# Allegro board HGU_60XX_V13_PCB_20140412.brd
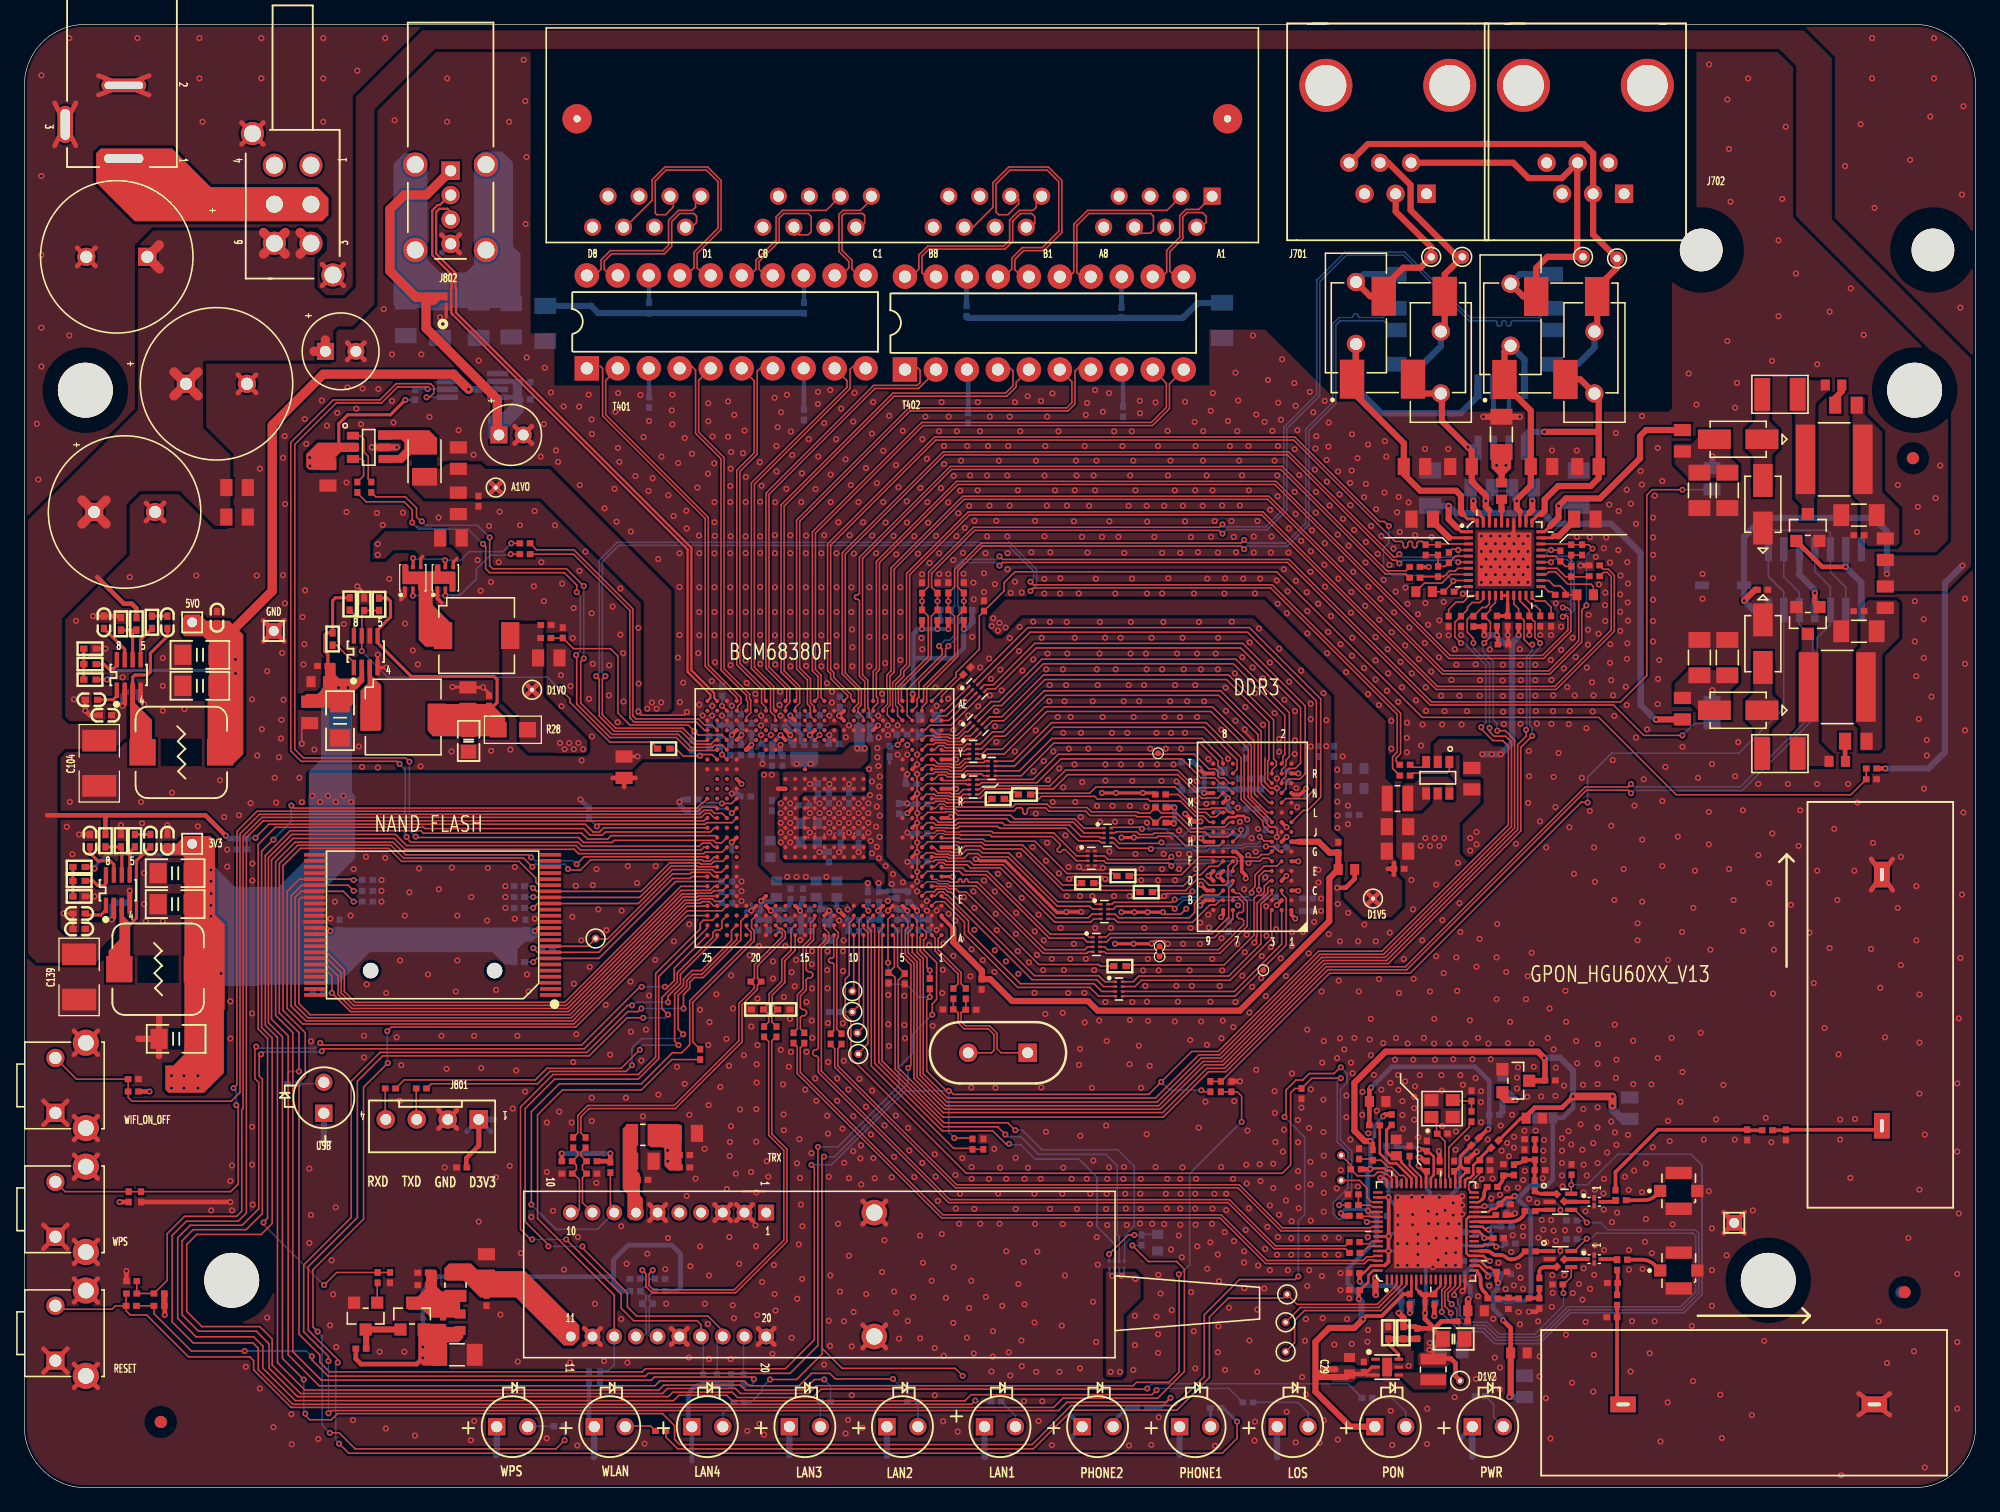
[diagram p0: board, top side]
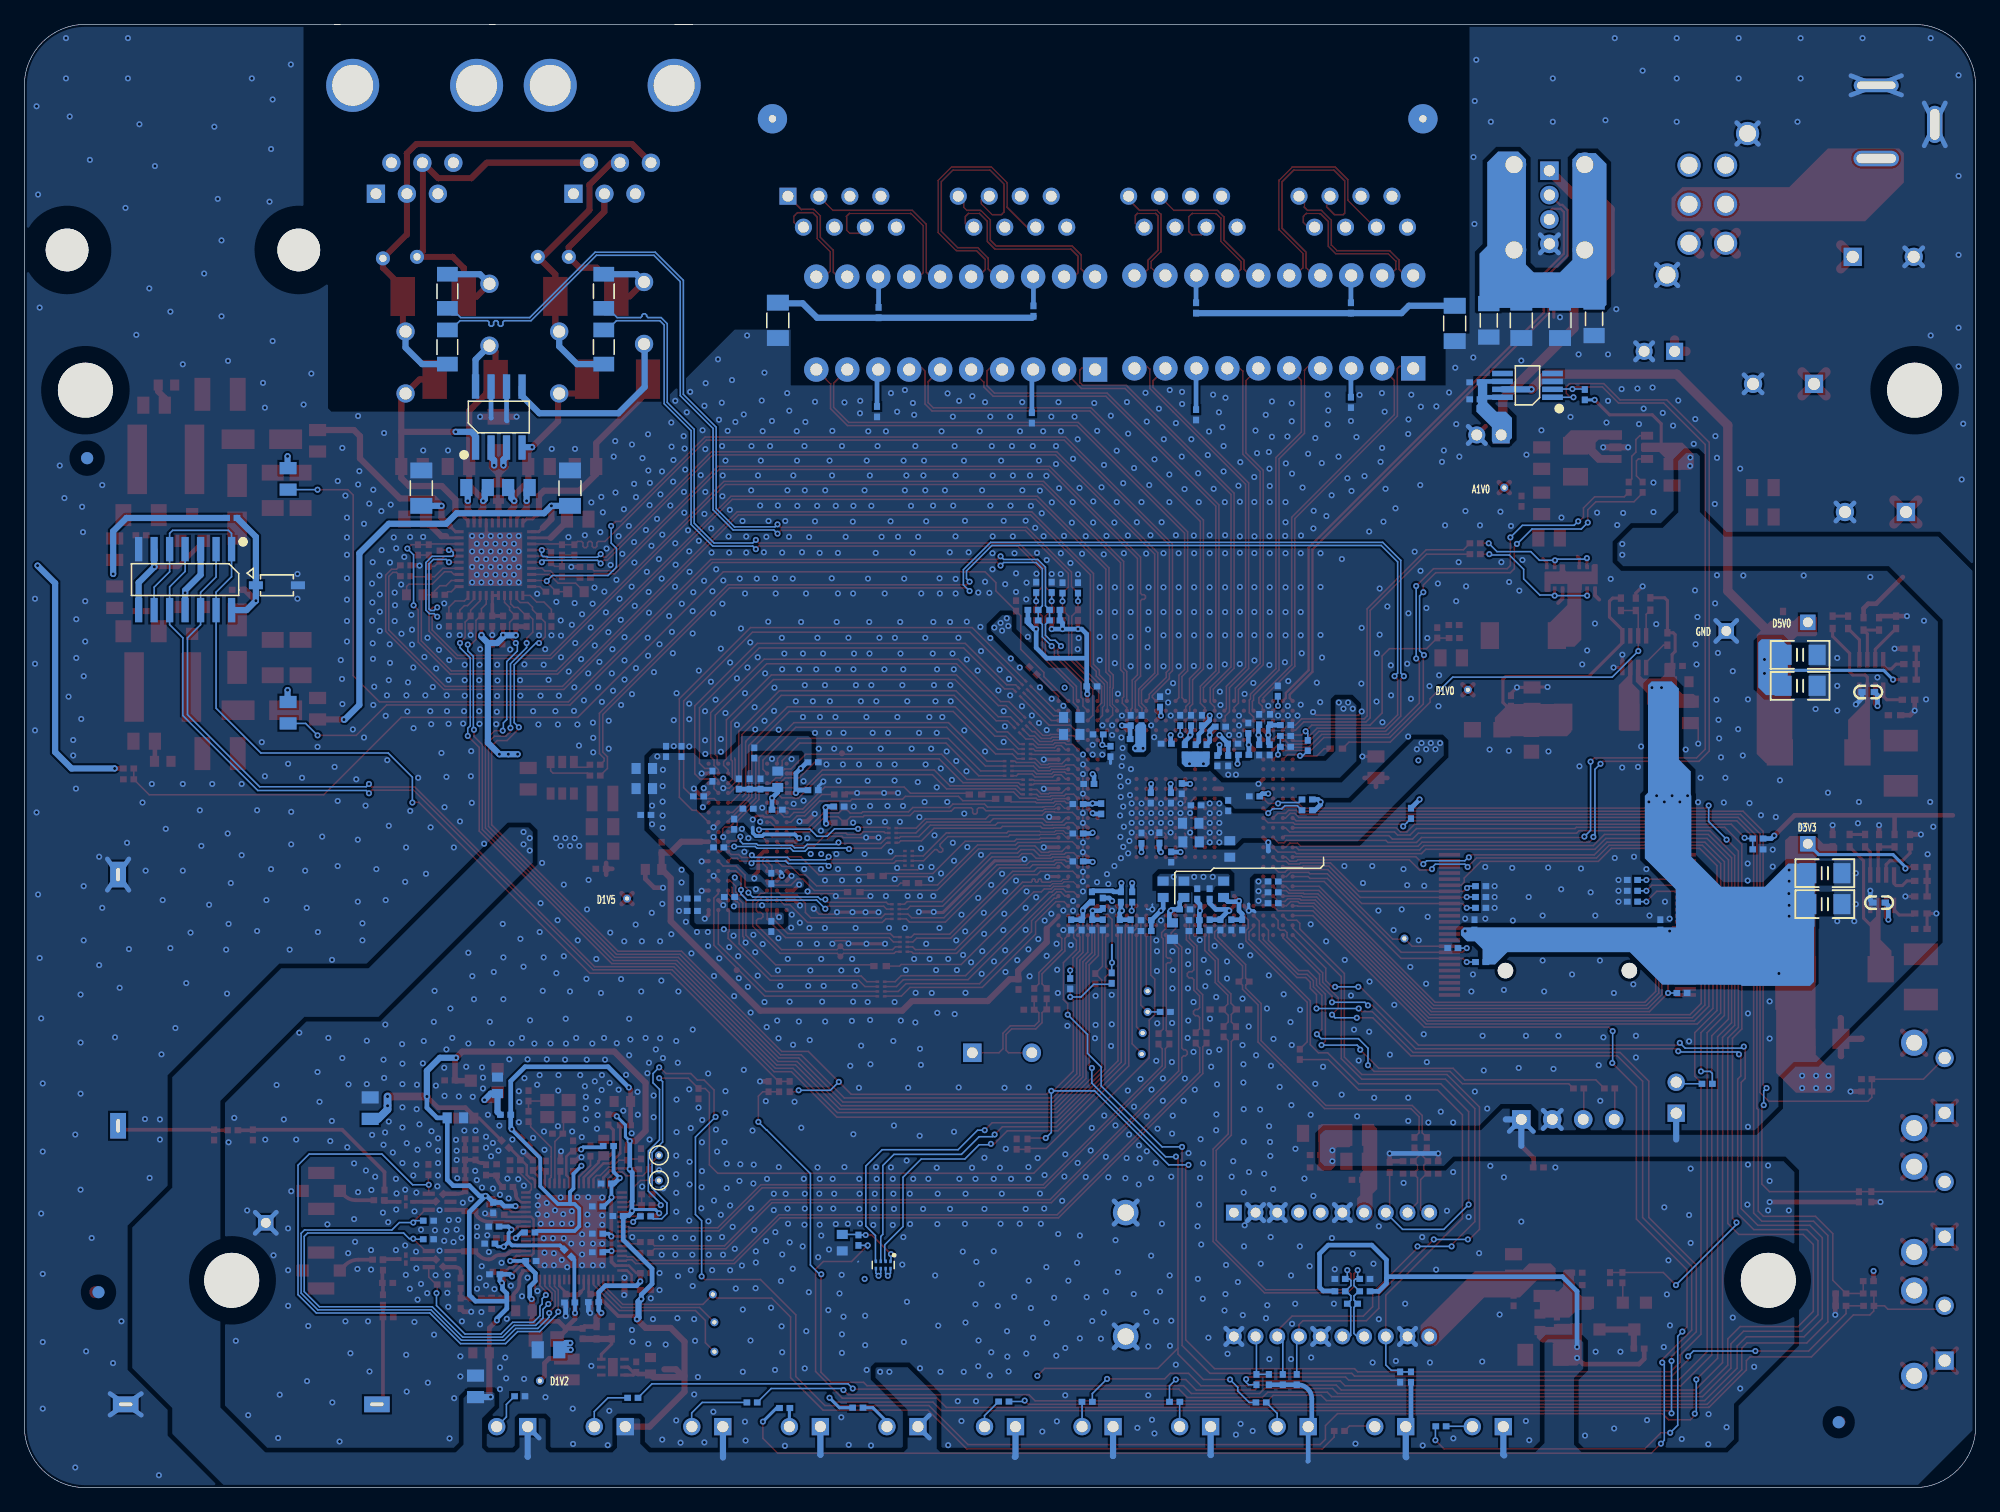
[diagram p1: board, bottom side, seen from below]

Outline 160 x 120 mm; copper layers: TOP, BOTTOM. Coordinates in mm from the lower left corner of the outline.
Outline path: 0,115 arc(0.97,117.96) 3.5,119.77 arc(4.24,119.94) 5,120 106.7,120 105.2,120 121.9,120 121.4,120 134.6,120 134.1,120 155,120 arc(158.54,118.54) 160,115 160,5 arc(158.54,1.46) 155,0 5,0 arc(1.46,1.46) 0,5 0,115

## Design rules (mm)
net group CLK48_XTAL: nets XTALN XTALP
net group DDR_CLK0: nets DDR_CLK0_N DDR_CLK0_P
net group DDR_DQS0: nets DDR_DQS0_N DDR_DQS0_P
net group DDR_DQS1: nets DDR_DQS1_N DDR_DQS1_P
net group DIFFPAIR1: nets VIN_REF_VADC_B VIP_DIAG_VADC_B
net group DIFFPAIR2: nets VIN_REF_VADC_A VIP_DIAG_VADC_A
net group DIFFPAIR4: nets RINGSENA TIPSENA
net group DIFFPAIR5: nets RINGSENB TIPSENB
net group DIFFPAIR6: nets EPHY3_TRD0_N EPHY3_TRD0_P
net group DIFFPAIR7: nets EPHY3_TRD1_N EPHY3_TRD1_P
net group DIFFPAIR8: nets EPHY2_TRD1_N EPHY2_TRD1_P
net group DIFFPAIR9: nets EPHY2_TRD0_N EPHY2_TRD0_P
net group DIFFPAIR10: nets EPHY1_TRD0_N EPHY1_TRD0_P
net group DIFFPAIR11: nets EPHY1_TRD1_N EPHY1_TRD1_P
net group DIFFPAIR12: nets EPHY0_TRD1_N EPHY0_TRD1_P
net group DIFFPAIR19: nets VRXB_N VRXB_P
net group DIFFPAIR20: nets VTXB_N VTXB_P
net group DIFFPAIR21: nets VRXA_N VRXA_P
net group DIFFPAIR22: nets VTXA_N VTXA_P
net group DIFFPAIR24: nets PCIE_RDN PCIE_RDP
net group DIFFPAIR28: nets U1_RDN0 U1_RDP0
net group DQS1: nets MEM_DQS1_N MEM_DQS1_P
net group E_TRD0: nets EPHY0_TRD0_N EPHY0_TRD0_P
net group GPON_RDN: nets GPON_RDN S_GPON_RDN
net group GPON_RDP: nets GPON_RDP S_GPON_RDP
net group GPON_TDN: nets GPON_TDN S_GPON_TDN
net group GPON_TDP: nets GPON_TDP S_GPON_TDP
net group MEM_DQS0: nets MEM_DQS0_N MEM_DQS0_P
net group PCIE_CLKOUTN: nets PCI_CKN PCIE_CLKOUTN
net group PCIE_CLKOUTP: nets PCI_CKP PCIE_CLKOUTP
net group PCIE_TDN: nets PCI_TN PCIE_TDN
net group PCIE_TDP: nets PCI_TP PCIE_TDP
net group PWR_012_MIL_PH: nets N78072419 N78072435
net group RX0: nets RXN0 RXP0
net group RX1: nets RXN1 RXP1
net group RX2: nets RXN2 RXP2
net group RX3: nets RXN3 RXP3
net group TX0: nets TXN0 TXP0
net group TX1: nets TXN1 TXP1
net group TX2: nets TXN2 TXP2
net group TX3: nets TXN3 TXP3
net group USB2: nets USB0_DM USB0_DP
net group XTAL_2: nets N77477926 N77477934
net group PWR_010_MIL_PH: nets +5V_GATE
net group TDM: nets FSPI_RXD TRX_ROUG_ONT TRX_SD

## Placement (name value [footprint] x y rotation side)
ANT1  N2430GNS  [DIP2_N2430GNS]  141.39 6.83 180 top
ANT2  N2430GNS  [DIP2_N2430GNS]  152.32 39.98 270 top
C1  10pF  [CAPC1005_IS0402Q]  120.37 24.66 0 top
C2  8pF  [CAPC1005_IS0402Q]  116.28 29.03 0 top
C4  10pF  [CAPC1005_IS0402Q]  130.92 23.57 0 top
C5  10pF  [CAPC1005_IS0402Q]  131.02 18.69 0 top
C6  10pF  [CAPC1005_IS0402Q]  120.42 15.52 0 top
C7  10pF (DNI)  [CAPC1005_IS0402Q]  126.87 20.37 180 bottom
C8  10pF (DNI)  [CAPC1005_IS0402Q]  126.87 21.89 180 bottom
C9  0.1uF  [CAPC1005_IS0402Q]  109.09 19.25 0 top
C10  0.1uF  [CAPC1005_IS0402Q]  109.06 20.14 0 top
C11  10pF  [CAPC1005_IS0402Q]  130.6 18.26 270 top
C12  10pF  [CAPC1005_IS0402Q]  130.47 23.97 90 top
C13  1uF  [CAPC1005_IS0402Q]  115.29 15.18 0 bottom
C14  0.1uF  [CAPC1005_IS0402Q]  109.06 17.6 180 top
C15  0.1uF  [CAPC1005_IS0402Q]  113 20.82 0 bottom
C16  0.1uF  [CAPC1005_IS0402Q]  113 19.3 0 bottom
C17  10pF (DNI)  [CAPC1005_IS0402Q]  126.87 26.08 90 top
C18  10pF  [CAPC1005_IS0402Q]  130.22 16.79 0 top
C19  10pF (DNI)  [CAPC1005_IS0402Q]  125.73 16.66 180 top
C20  10pF  [CAPC1005_IS0402Q]  130.18 13.97 0 top
C21  0.1uF  [CAPC1005_IS0402Q]  115.62 15.44 270 top
C22  10pF  [CAPC1005_IS0402Q]  141.27 28.93 90 top
C23  0.1uF  [CAPC1005_IS0402Q]  115.01 28.02 90 top
C24  0.1uF  [CAPC1005_IS0402Q]  117.24 26.36 90 top
C25  0.1uF  [CAPC1005_IS0402Q]  118.31 26.44 90 top
C26  1uF  [CAPC1005_IS0402Q]  116.05 26.36 90 top
C27  0.1uF  [CAPC1005_IS0402Q]  115.01 26.36 90 top
C28  100pF  [CAPC1005_IS0402Q]  114.22 12.63 90 top
C29  4.7uF  [CAPC1608_IS0603Q]  108.66 9.99 90 top
C30  0.1uF  [CAPC1005_IS0402Q]  112.29 24.94 0 bottom
C31  0.1uF  [CAPC1005_IS0402Q]  121.43 17.5 0 bottom
C32  4.7uF  [CAPC1608_IS0603Q]  119.04 14.5 180 top
C33  4.7uF  [CAPC1608_IS0603Q]  122.55 11.04 180 top
C34  0.1uF  [CAPC1005_IS0402Q]  113.33 15.21 0 bottom
C35  0.1uF  [CAPC1005_IS0402Q]  113 23.06 0 bottom
C36  4.7uF  [CAPC1608_IS0603Q]  124.66 30.32 0 bottom
C37  2.2uF  [CAPC1608_IS0603Q]  123.82 30.3 0 top
C38  10pF  [CAPC1005_IS0402Q]  144.44 28.93 90 top
C39  0.1uF  [CAPC1005_IS0402Q]  111.32 22.27 0 bottom
C40  0.1uF  [CAPC1005_IS0402Q]  121.56 22.96 270 bottom
C41  0.1uF  [CAPC1005_IS0402Q]  109.06 16.2 180 top
C42  0.1uF  [CAPC1005_IS0402Q]  113.58 15.44 270 top
C43  0.1uF  [CAPC1005_IS0402Q]  119.76 26.84 0 top
C44  22uF_6.3V  [C0805]  117.2 12.19 180 top
C45  0.1uF  [CAPC1005_IS0402Q]  109.83 9.89 90 top
C46  10pF  [CAPC1005_IS0402Q]  130.6 15.39 90 top
C47  10pF  [CAPC1005_IS0402Q]  142.92 29.31 180 top
C48  0.1uF  [CAPC1005_IS0402Q]  121.15 17.7 0 top
C49  0.1uF  [CAPC1005_IS0402Q]  24.46 67.39 180 top
C50  0.1uF  [CAPC1005_IS0402Q]  121.43 23.24 0 top
C51  10pF (DNI)  [CAPC1005_IS0402Q]  123.46 22.68 0 top
C52  10pF (DNI)  [CAPC1005_IS0402Q]  123.49 19.38 0 top
C53  4.7uF  [CAPC1608_IS0603Q]  24.18 66.09 180 top
C54  18pF  [CAPC1005_IS0402Q]  118.66 32.13 90 top
C55  100pF  [CAPC1005_IS0402Q]  38.1 64.52 270 top
C56  22uF_6.3V  [C0805]  36.42 61.24 90 top
C59  1uF  [CAPC1005_IS0402Q]  120.87 20.47 0 top
C60  0.1uF  [CAPC1005_IS0402Q]  121.51 21.41 0 bottom
C61  0.1uF  [CAPC1005_IS0402Q]  121.84 20.01 0 bottom
C62  0.1uF  [CAPC1005_IS0402Q]  118.46 18.59 180 bottom
C63  0.1uF  [CAPC1005_IS0402Q]  121.08 22.37 0 top
C64  0.01uF  [CAPC1005_IS0402Q]  113.58 27.61 90 top
C65  4.7uF  [CAPC1608_IS0603Q]  112.49 27.88 90 top
C66  4.7uF  [CAPC1608_IS0603Q]  110.97 31.67 180 top
C72  1pF (DNI)  [CAPC1005_IS0402Q]  123.87 27.3 90 top
C74  1uF  [CAPC1005_IS0402Q]  125.12 33.4 0 top
C75  2.2uF  [CAPC1608_IS0603Q]  121.2 32.99 90 bottom
C78  10uF  [CAPC2012_IS0805Q]  117.03 11.3 0 bottom
C79  10uF  [CAPC2012_IS0805Q]  36.37 64.74 90 top
C80  22uF_16V  [C1206]  12.45 36.8 0 top
C101  100uF  [CAPAETR2_250P630X1120]  24.68 93.19 90 top
C102  10uF  [CAPC2012_IS0805Q]  17.44 79.6 0 top
C103  10uF  [CAPC2012_IS0805Q]  17.44 82.01 0 top
C104  22uF_25V  [C1210]  6.14 59.41 90 top
C105  0.1uF_25V  [C0402]  8.81 65.25 180 bottom
C106  0.1uF_25V  [C0402]  4.49 47.09 0 top
C108  0.1uF_25V  [C0402]  10.33 53.06 90 top
C109  10uF  [CAPC2012_IS0805Q]  118.69 58.14 270 top
C110  22uF  [CAPC2012_IS0805Q]  112.59 54.2 0 top
C111  10uF (DNI)  [CAPC2012_IS0805Q]  112.59 52.2 0 top
C112  0.1uF  [CAPC1005_IS0402Q]  112.72 50.75 0 top
C113  220pF  [CAPC1608_IS0603Q]  148.66 59.56 180 top
C114  10uF  [CAPC3216_IS1206N]  150.43 70.23 180 top
C115  0.01uF  [CAPC1005_IS0402Q]  150.43 71.88 180 top
C116  0.1uF  [CAPC1005_IS0402Q]  142.54 73.63 0 top
C117  1uF  [CAPC3216_IS1206N]  139.64 68.07 270 top
C118  0.47uF (DNI)  [CAPC3216_IS1206N]  137.35 68.07 270 top
C119  1uF  [CAPC3216_IS1206N]  139.64 81.79 90 top
C120  0.47uF (DNI)  [CAPC3216_IS1206N]  137.35 81.79 90 top
C121  0.22uF  [CAPC3225_IS1210N]  143.96 60.2 180 top
C122  220pF  [CAPC1608_IS0603Q]  148.35 90.42 180 top
C123  0.22uF  [CAPC3225_IS1210N]  143.96 89.66 180 top
C124  0.1uF_25V  [C0402]  5.38 53.06 270 top
C125  10uF  [CAPC3216_IS1206N]  150.43 79.75 180 top
C126  0.01uF  [CAPC1005_IS0402Q]  150.43 78.1 180 top
C127  0.1uF  [CAPC1005_IS0402Q]  78.69 72.31 90 top
C129  0.1uF  [CAPC1005_IS0402Q]  37.24 80.9 270 top
C130  10uF  [CAPC2012_IS0805Q]  35.59 80.72 270 top
C131  22uF  [CAPC2012_IS0805Q]  35.59 84.43 90 top
C132  22uF_16V  [C1206]  12.36 47.85 0 bottom
C133  22uF_16V  [C1206]  12.36 50.39 0 bottom
C134  22uF_16V  [C1206]  12.36 47.85 0 top
C135  22uF_16V  [C1206]  12.36 50.39 0 top
C136  0.1uF_25V  [C0402]  11.73 53.06 270 top
C137  0.1uF_25V  [C0402]  7.92 47.98 180 bottom
C139  22uF_25V  [C1210]  4.49 41.88 90 top
C140  0.1uF_25V  [C0402]  4.49 45.82 0 top
C141  0.1uF_25V  [C0402]  5.5 64.61 0 top
C142  0.1uF_25V  [C0402]  6.52 70.96 270 top
C143  0.1uF_25V  [C0402]  6.65 63.34 0 top
C144  0.1uF_25V  [C0402]  11.73 70.96 90 top
C145  22uF_16V  [C1206]  14.39 68.3 0 top
C146  22uF_16V  [C1206]  14.39 65.76 0 top
C150  0.22uF  [CAPC1005_IS0402Q]  56.59 61.64 180 bottom
C158  22uF_16V  [C1206]  25.88 62.89 90 top
C165  3300pF  [CAPC1005_IS0402Q]  73.61 73.79 270 bottom
C166  3300pF  [CAPC1005_IS0402Q]  74.88 73.79 270 bottom
C167  3300pF  [CAPC1005_IS0402Q]  77.03 73.84 90 bottom
C171  1000uF (DNI)  [CAPAETR2_500P1250X2000]  10.08 100.94 270 top
C172  1000uF (DNI)  [CAPAETR2_500P1250X2000]  13.25 90.52 90 top
C173  1000uF  [CAPAETR2_500P1250X2000]  5.71 80.01 90 top
C176  10uF  [CAPC2012_IS0805Q]  34.98 77.88 0 top
C177  10uF  [CAPC2012_IS0805Q]  24.89 83.06 270 top
C178  0.1uF  [CAPC1005_IS0402Q]  42.77 70.74 0 top
C179  10uF  [CAPC2012_IS0805Q]  43 68.05 0 top
C180  3300pF  [CAPC1005_IS0402Q]  75.76 73.84 90 bottom
C184  3300pF  [CAPC1005_IS0402Q]  75.51 71.98 180 bottom
C189  3300pF  [CAPC1005_IS0402Q]  77.29 71.98 0 bottom
C201  0.1uF  [CAPC1005_IS0402Q]  100.15 60.25 270 bottom
C202  0.1uF  [CAPC1005_IS0402Q]  104.72 56.69 180 bottom
C203  0.1uF  [CAPC1005_IS0402Q]  95.32 57.2 180 bottom
C204  0.1uF  [CAPC1005_IS0402Q]  98.75 46.02 270 bottom
C205  0.1uF  [CAPC1005_IS0402Q]  107.39 60.37 90 bottom
C206  0.1uF  [CAPC1005_IS0402Q]  100.66 55.68 180 bottom
C207  0.1uF  [CAPC1005_IS0402Q]  95.32 59.49 180 bottom
C208  0.1uF  [CAPC1005_IS0402Q]  101.8 54.41 270 bottom
C209  0.1uF  [CAPC1005_IS0402Q]  98.75 49.96 90 bottom
C210  0.1uF  [CAPC1005_IS0402Q]  105.23 48.31 0 bottom
C211  0.1uF  [CAPC1005_IS0402Q]  109.04 55.17 0 bottom
C212  0.1uF  [CAPC1005_IS0402Q]  103.07 52.5 180 bottom
C213  0.1uF  [CAPC1005_IS0402Q]  106.12 60.37 90 bottom
C214  0.1uF  [CAPC1005_IS0402Q]  105.23 47.29 0 bottom
C215  0.1uF  [CAPC1005_IS0402Q]  103.58 58.34 270 bottom
C216  0.1uF  [CAPC1005_IS0402Q]  102.18 48.44 180 bottom
C217  4.7uF  [CAPC1608_IS0603Q]  109.17 57.33 0 bottom
C218  4.7uF  [CAPC1608_IS0603Q]  109.17 58.98 0 bottom
C219  15pF  [CAPC1005_IS0402Q]  77.62 39.19 0 top
C220  15pF  [CAPC1005_IS0402Q]  75.74 39.22 180 top
C223  0.1uF  [CAPC1005_IS0402Q]  41.09 46.15 90 bottom
C224  0.1uF  [CAPC1005_IS0402Q]  25.85 46.15 90 bottom
C229  0.1uF  [CAPC1005_IS0402Q]  98.27 55.6 180 bottom
C230  0.1uF  [CAPC1005_IS0402Q]  93.21 55.85 180 bottom
C232  2.2uF (DNI)  [CAPC1608_IS0603Q]  92.93 20.09 270 bottom
C233  1000pF  [CAPC1005_IS0402Q]  8.79 16.93 180 top
C234  4.7uF  [CAPC1608_IS0603Q]  108.41 50.7 180 top
C235  4.7uF  [CAPC1608_IS0603Q]  98.22 58.09 270 bottom
C251  0.1uF  [CAPC1005_IS0402Q]  78.49 41.27 270 top
C252  470pF  [CAPC1005_IS0402Q]  107.74 52.5 270 top
C256  470pF  [CAPC1005_IS0402Q]  99.64 57.71 270 bottom
C257  1uF  [CAPC1005_IS0402Q]  9.57 23.85 270 top
C258  1uF  [CAPC1005_IS0402Q]  8.93 33.5 0 top
C301  0.01uF  [CAPC1005_IS0402Q]  34.33 13.56 90 top
C302  100uF  [CAPC3216_IS1206N]  35.48 10.89 0 top
C303  0.01uF  [CAPC1005_IS0402Q]  32.68 16.61 180 top
C304  0.1uF  [CAPC1005_IS0402Q]  32.68 17.62 0 top
C305  10uF  [CAPC2012_IS0805Q]  37.89 18.26 270 top
C306  0.1uF  [CAPC1005_IS0402Q]  37.89 15.34 90 top
C307  10uF  [CAPC2012_IS0805Q]  54.27 29.05 180 top
C309  0.01uF  [CAPC1005_IS0402Q]  54.14 27.28 0 top
C310  0.1uF  [CAPC1005_IS0402Q]  54.14 26.26 180 top
C311  10uF  [CAPC2012_IS0805Q]  50.72 26.77 180 top
C312  0.1uF  [CAPC1005_IS0402Q]  50.72 25.24 180 top
C313  0.1uF  [CAPC1005_IS0402Q]  61.67 37.39 270 top
C314  0.1uF  [CAPC1005_IS0402Q]  60.65 37.39 270 top
C315  0.1uF  [CAPC1005_IS0402Q]  46.02 28.29 270 top
C316  0.1uF  [CAPC1005_IS0402Q]  45 28.29 270 top
C405  0.1uF  [CAPC1005_IS0402Q]  51.22 89 90 bottom
C406  0.1uF  [CAPC1005_IS0402Q]  63.92 87.98 90 bottom
C407  0.1uF  [CAPC1005_IS0402Q]  77.39 87.73 90 bottom
C408  0.1uF  [CAPC1005_IS0402Q]  90.09 88.24 90 bottom
C409  22uF_16V  [C1206]  14.39 68.3 0 bottom
C414  22uF_16V  [C1206]  14.39 65.76 0 bottom
C415  0.1uF_25V  [C0402]  15.79 71.34 270 top
C417  1000pf (DNI)  [CAPC3216_IS1206N]  42.71 95.47 90 bottom
C422  1000pf (DNI)  [CAPC3216_IS1206N]  98.21 95.73 90 bottom
C504  10uF  [CAPC2012_IS0805Q]  123.01 8.3 90 bottom
C505  10uF  [CAPC2012_IS0805Q]  131.64 31.12 90 bottom
C506  10uF  [CAPC2012_IS0805Q]  49.17 59.08 90 top
C507  10uF  [CAPC2012_IS0805Q]  23.39 63.58 270 top
C602  10pF  [CAPC1005_IS0402Q]  124.23 16.76 90 top
C603  10pF  [CAPC1005_IS0402Q]  123.85 24.76 270 top
C701  0.1uF  [CAPC1005_IS0402Q]  121.25 69.16 180 top
C704  0.47uF  [CAPC1608_IS0603Q]  114.78 73.47 180 top
C705  3300pF  [CAPC2012_IS0805Q]  117.8 83.74 0 top
C706  3300pF  [CAPC2012_IS0805Q]  113.99 83.74 180 top
C708  0.1uF  [CAPC1005_IS0402Q]  114.01 75.51 180 top
C710  0.1uF  [CAPC1005_IS0402Q]  114.01 74.62 180 top
C711  220pF  [CAPC1005_IS0402Q]  115.92 76.9 90 top
C712  0.1uF  [CAPC3216_IS1206N]  115.26 81.96 270 bottom
C713  220pF  [CAPC1005_IS0402Q]  126.84 76.9 90 top
C714  1uF  [CAPC1005_IS0402Q]  121.63 71.06 90 top
C720  0.1uF  [CAPC2012_IS0805Q]  114.63 79.42 0 top
C721  0.1uF  [CAPC1005_IS0402Q]  116.79 71.04 90 top
C726  0.1uF  [CAPC3216_IS1206N]  121.12 86.37 270 top
C727  0.1uF  [CAPC2012_IS0805Q]  127.96 79.42 180 top
C728  0.1uF  [CAPC1005_IS0402Q]  124.3 71.06 90 top
C732  1uF  [CAPC1005_IS0402Q]  72.46 65.71 180 bottom
C733  1uF  [CAPC1005_IS0402Q]  66.87 64.44 90 bottom
C741  0.1uF  [CAPC1005_IS0402Q]  128.75 74.74 0 top
C743  0.1uF  [CAPC3216_IS1206N]  127.45 81.96 270 bottom
C744  0.1uF  [CAPC1005_IS0402Q]  128.75 75.63 0 top
C746  0.47uF  [CAPC1608_IS0603Q]  127.98 73.22 0 top
C747  3300pF  [CAPC2012_IS0805Q]  124.41 83.74 180 top
C748  3300pF  [CAPC2012_IS0805Q]  128.22 83.74 0 top
C800  0.1uF  [CAPC1005_IS0402Q]  41.06 90.65 0 bottom
C801  0.1uF  [CAPC1005_IS0402Q]  35.86 26.26 180 top
C802  100pF  [CAPC1005_IS0402Q]  67 36.8 90 top
C803  100pF  [CAPC1005_IS0402Q]  66.11 36.8 90 top
C804  0.1uF  [CAPC1005_IS0402Q]  63.95 36.88 90 top
C805  0.1uF  [CAPC1005_IS0402Q]  63.06 36.88 90 top
C806  100uF  [CAPAETR2_200P500X1100]  38.9 86.33 90 top
C807  0.1uF  [CAPC1005_IS0402Q]  41.06 89.25 0 bottom
C812  1000pf  [CAPC3216_IS1206N]  37.25 95.73 270 bottom
C813  1000pf  [CAPC3216_IS1206N]  34.08 95.73 270 bottom
C901  4.7uF  [CAPC1608_IS0603Q]  74.11 63.17 0 bottom
C902  4.7uF  [CAPC1608_IS0603Q]  74.11 61.77 0 bottom
C903  0.1uF  [CAPC1005_IS0402Q]  72.72 57.71 0 bottom
C904  0.1uF  [CAPC1005_IS0402Q]  73.61 56.06 0 bottom
C905  0.1uF  [CAPC1005_IS0402Q]  73.61 53.64 0 bottom
C906  0.1uF  [CAPC1005_IS0402Q]  73.61 51.36 0 bottom
C907  0.1uF  [CAPC1005_IS0402Q]  59.13 56.69 0 bottom
C908  1uF  [CAPC1005_IS0402Q]  69.29 62.91 90 bottom
C909  0.1uF  [CAPC1005_IS0402Q]  68.4 62.91 90 bottom
C910  1uF  [CAPC1005_IS0402Q]  61.92 62.41 180 bottom
C911  0.1uF  [CAPC1005_IS0402Q]  57.6 48.82 180 bottom
C912  0.1uF  [CAPC1005_IS0402Q]  57.6 47.93 180 bottom
C913  0.1uF  [CAPC1005_IS0402Q]  57.6 49.71 180 bottom
C920  1uF  [CAPC1005_IS0402Q]  66.37 61.01 0 bottom
C922  1uF  [CAPC1005_IS0402Q]  64.33 62.91 90 bottom
C923  22uF  [CAPC1608_IS0603Q]  61.16 52.37 270 bottom
C924  22uF  [CAPC1608_IS0603Q]  64.36 54.48 0 bottom
C925  22uF (DNI)  [CAPC1608_IS0603Q]  64.33 52.96 0 bottom
C931  0.1uF  [CAPC1005_IS0402Q]  65.99 56.56 270 bottom
C932  0.1uF  [CAPC1005_IS0402Q]  66.93 53.29 90 bottom
C933  0.1uF  [CAPC1005_IS0402Q]  65.96 51.71 270 bottom
C934  0.1uF  [CAPC1005_IS0402Q]  68.4 53.26 90 bottom
C935  0.1uF  [CAPC1005_IS0402Q]  61.29 55.93 90 bottom
C936  0.1uF  [CAPC1005_IS0402Q]  63.93 55.95 0 bottom
C937  0.1uF  [CAPC1005_IS0402Q]  65.1 57.33 270 bottom
C938  0.1uF  [CAPC1005_IS0402Q]  67.64 56.56 270 bottom
C941  1uF  [CAPC1005_IS0402Q]  63.45 62.91 90 bottom
C943  1uF  [CAPC1005_IS0402Q]  60.91 61.01 180 bottom
C944  1000pF  [CAPC1005_IS0402Q]  68.02 46.53 0 bottom
C945  1uF  [CAPC1005_IS0402Q]  68.02 45.64 0 bottom
C946  1000pF  [CAPC1005_IS0402Q]  64.84 47.42 180 bottom
C947  10uF  [CAPC1608_IS0603Q]  65.86 45.64 270 bottom
C948  1uF (DNI)  [CAPC1005_IS0402Q]  59.64 62.28 90 bottom
C949  1uF (DNI)  [CAPC1005_IS0402Q]  58.75 62.99 90 bottom
C950  1000pF  [CAPC1005_IS0402Q]  56.59 62.53 180 bottom
C951  1uF  [CAPC1005_IS0402Q]  57.86 62.99 90 bottom
C952  1000pF  [CAPC1005_IS0402Q]  62.81 46.15 270 bottom
C953  1uF  [CAPC1005_IS0402Q]  61.92 46.15 270 bottom
C954  1000pF  [CAPC1005_IS0402Q]  64.08 45.64 0 bottom
C955  1uF  [CAPC1005_IS0402Q]  64.08 46.53 0 bottom
C956  1000pF  [CAPC1005_IS0402Q]  61.03 46.15 270 bottom
C957  1uF  [CAPC1005_IS0402Q]  60.14 46.15 270 bottom
C958  1uF  [CAPC1005_IS0402Q]  72.44 46.15 270 bottom
C959  1000pF  [CAPC1005_IS0402Q]  71.57 46.15 270 bottom
C960  1uF  [CAPC1005_IS0402Q]  70.18 46.15 270 bottom
C961  1000pF  [CAPC1005_IS0402Q]  69.29 46.15 270 bottom
C962  1000pF  [CAPC1005_IS0402Q]  74.16 46.15 270 bottom
C963  1uF  [CAPC1005_IS0402Q]  73.3 46.15 270 bottom
D101  ES1D  [DIOM4326_SMA_DO214ACN]  140.53 63.75 180 top
D102  ES1D  [DIOM4326_SMA_DO214ACN]  140.53 85.98 180 top
D103  ES1D  [DIOM4326_SMA_DO214ACN]  142.56 69.21 270 top
D104  ES1D  [DIOM4326_SMA_DO214ACN]  142.56 80.64 90 top
D121  MMSZ4687T1G  [DIOS2_ON_SOD123N]  139.29 74 180 bottom
D201  1LED  [LED_2_2_54]  120 5 0 top
D202  1LED  [LED_2_2_54]  112 5 0 top
D203  1LED  [LED_2_2_54]  104 5 0 top
D205  1LED  [LED_2_2_54]  40 5 0 top
D206  1LED  [LED_2_2_54]  96 5 0 top
D207  1LED  [LED_2_2_54]  88 5 0 top
D208  1LED  [LED_2_2_54]  80 5 0 top
D209  1LED  [LED_2_2_54]  72 5 0 top
D210  1LED  [LED_2_2_54]  64 5 0 top
D211  1LED  [LED_2_2_54]  56 5 0 top
D212  1LED  [LED_2_2_54]  48 5 0 top
D213  1LED  [LED_2_2_54]  24.55 31.97 90 top
D800  RClamp0582N  [SLP1210N6]  34.97 97.25 0 top
FB1  10 Ohms  [INDC1005_IS0402Q]  117.93 13.64 180 top
FB2  600@100MHz  [INDC1005_IS0402Q]  118.94 28.37 225 top
FB3  600 Ohms  [INDC1005_IS0402Q]  115.44 19.22 225 bottom
FB102  60@100MHz  [INDC2012_IS0805Q]  152.59 73.02 270 top
FB103  60@100MHz  [INDC2012_IS0805Q]  152.59 76.96 90 top
FB702  600 Ohms  [INDC1005_IS0402Q]  120.74 71.06 90 top
FB901  220@100MHz  [INDC1005_IS0402Q]  68.91 61.39 0 bottom
FB902  600 Ohms  [INDC1005_IS0402Q]  63.06 60.5 270 bottom
FB903  600 Ohms  [INDC1005_IS0402Q]  62.18 59.61 270 bottom
FB904  600 Ohms  [INDC1005_IS0402Q]  64.84 60.5 270 bottom
FB905  600 Ohms  [INDC1005_IS0402Q]  63.95 60.5 270 bottom
FB906  600 Ohms  [INDC1005_IS0402Q]  61.29 59.61 270 bottom
FB907  220@100MHz  [INDC1608_IS0603Q]  66.62 49.07 90 bottom
FB908  220@100MHz  [INDC1608_IS0603Q]  64.92 49.07 270 bottom
FB909  600 Ohms  [INDC1005_IS0402Q]  57.88 60.5 270 bottom
FB910  600 Ohms  [INDC1005_IS0402Q]  62.81 48.69 90 bottom
FB911  600 Ohms  [INDC1005_IS0402Q]  63.83 48.69 90 bottom
FB912  220@100MHz  [INDC1608_IS0603Q]  61.67 49.07 90 bottom
FB913  600 Ohms  [INDC1005_IS0402Q]  71.57 47.93 270 bottom
FB914  600 Ohms  [INDC1005_IS0402Q]  70.09 48.44 90 bottom
FB915  600 Ohms  [INDC1005_IS0402Q]  72.46 48.44 90 bottom
FL1  LFL152G45TC1A219  [FILS4_MUR_LFL152G45TC1Q]  128.72 18.74 0 top
FL2  LFL152G45TC1A219  [FILS4_MUR_LFL152G45TC1Q]  128.72 23.44 0 top
GND  TEST HOLE  [TH50SQ32D]  140.21 21.72 0 top
J2  A-1JB  [AMPHL_A-1JB]  135.66 17.8 270 top
J3  A-1JB  [AMPHL_A-1JB]  135.65 24.33 270 top
J101  AJ_DR_DS210  [DS_210]  8 112 270 top
J401  RJ45-1X4-8P-RA  [NETSWAP_NSK-U-04-8-8-X-X]  97.39 105.91 180 top
J701  5523-1-6P4C  [AMPHL_RJE01-640-021]  114.98 106.11 180 top
J702  5523-1-6P4C  [AMPHL_RJE01-640-021]  131.17 106.11 180 top
J801  TJC3-4  [HDR1X4]  37.25 30.2 180 top
J802  USB-UPRIGHT  [MOL_67329-8020]  34.95 108 270 top
L1  1.8nH (DNI)  [INDC1005_IS0402Q]  123.44 28.57 180 top
L2  2.7nH (DNI)  [INDC1005_IS0402Q]  124.28 26.03 0 top
L3  4.7nH  [INDS2_MUR_LQG15HQ]  121.69 15.11 0 top
L4  2.2uH  [INDS2_CYN_PS125201BQ]  115.52 9.69 90 top
L5  2.0nH (DNI)  [INDC1005_IS0402Q]  124.23 15.11 270 top
L6  4.7nH  [INDS2_MUR_LQG15HQ]  121.28 26.06 180 top
L7  2.0nH (DNI)  [INDC1005_IS0402Q]  123.01 27.3 90 top
L8  1.5uH  [INDS2_TDK_SLF6045Q]  31.06 63.2 0 top
L102  5.6UH_3A  [PCS73]  10.96 42.52 90 top
L103  5.6UH_3A  [PCS73]  12.87 60.3 90 top
L105  3.3uH  [INDS2_TDK_FLF3215TQ_MOD]  32.81 84.17 270 top
L106  1.5uH  [INDS2_TDK_SLF6045Q]  37.08 69.88 0 top
L110  1.5uH  [INDS2_CYN_PS125201BQ]  112.59 56.51 180 top
L111  0  [RESC2012_IS0805Q]  135.96 63.88 270 top
L112  0  [RESC2012_IS0805Q]  135.96 85.85 90 top
L113  10uH  [INDS2_TAYUD_NR6045Q]  148.66 65.66 270 top
L114  10uH  [INDS2_TAYUD_NR6045Q]  148.4 84.33 270 top
L301  1.2uH  [INDS2_CC_0805CSQ]  35.35 16.61 180 top
L302  1.2uH  [INDS2_CC_0805CSQ]  50.72 28.93 270 top
L901  22nH  [INDC1005_IS0402Q]  71.7 55.68 270 bottom
NOREF  -  [unnamed]  11.18 5.38 0 top
NOREF#2  -  [unnamed]  156.5 101.5 0 top
NOREF#3  -  [unnamed]  17 17 0 top
NOREF#4  -  [#2]  392.5 -124.03 0 top
NOREF#5  -  [unnamed]  155 90 0 top
NOREF#6  -  [unnamed]  154.86 84.43 0 top
NOREF#7  -  [unnamed]  143 17 0 top
NOREF#8  -  [unnamed]  137.5 101.5 0 top
NOREF#9  -  [unnamed]  5 90 0 top
NOREF#10  -  [unnamed]  154.18 16.03 0 top
NOREF#11  -  [#2]  392.5 -124.03 180 bottom
NOREF#12  -  [unnamed]  11.23 5.36 180 bottom
NOREF#13  -  [unnamed]  154.86 84.43 90 bottom
NOREF#14  -  [unnamed]  153.92 16.03 180 bottom
Q103  62-1057PBF  [SOT23_G_S_D]  146.24 71.12 180 top
Q104  62-1057PBF  [SOT23_G_S_D]  146.24 78.74 0 top
Q105  AO6604  [SOT23-6_1_2_3_4_5_6]  115.9 58.22 270 top
Q106  AO6604  [SOT23-6_1_2_3_4_5_6]  28.24 85.31 0 top
Q107  SIA517DJ-T1-GE3  [SON65P200X200_6_DUAL_SC70-6L]  34.52 74.61 90 top
Q108  SIA517DJ-T1-GE3  [SON65P200X200_6_DUAL_SC70-6L]  31.85 74.61 90 top
Q301  SI2323DS-T1-E3  [SOT23_G_S_D]  31.79 14.07 0 top
Q303  MMBT3904LT1G  [SOT23_B_E_C]  27.98 14.07 180 top
R1  422  [RESC1005_IS0402Q]  118.66 30.44 270 top
R2  4.7K  [RESC1005_IS0402Q]  109.19 26.11 180 top
R3  4.7K (DNI)  [RESC1005_IS0402Q]  109.44 27.38 90 top
R4  4.7K (DNI)  [RESC1005_IS0402Q]  110.56 27.28 90 top
R5  15K  [RESC1005_IS0402Q]  119.76 26.03 0 top
R7  10R_5C  [R0402]  10.46 70.96 90 top
R9  3K  [RESC1005_IS0402Q]  109.06 22.25 0 bottom
R10  0  [RESC1005_IS0402Q]  118.56 20.93 180 bottom
R11  5.6pF  [CAPC1005_IS0402Q]  122.96 15.52 0 top
R12  4.7K (DNI)  [RESC1005_IS0402Q]  108.96 24.05 0 top
R13  5.6pF  [CAPC1005_IS0402Q]  122.14 26.06 90 top
R14  0  [RESC1005_IS0402Q]  112.11 28.01 180 bottom
R15  0  [RESC1005_IS0402Q]  125.95 18.41 45 top
R16  0  [RESC1005_IS0402Q]  125.95 23.77 315 top
R17  0  [RESC1005_IS0402Q]  112.11 30.17 270 top
R20  0  [RESC1005_IS0402Q]  120.57 28.17 225 top
R21  100KR  [R0402]  25.27 69.6 270 top
R22  499KR  [R0402]  26.67 72.47 270 top
R23  0 (DNI)  [RESC1005_IS0402Q]  110.71 29.71 0 top
R24  200KR  [R0402]  29.08 72.44 90 top
R25  300KR  [R0402]  27.86 72.44 270 top
R26  0  [RESC1005_IS0402Q]  120.54 30.58 180 bottom
R27  105KR  [R0402]  113.08 12.7 90 top
R28  0R_NC  [R0805]  40.06 62.15 0 top
R29  NC  [R0402]  52.43 60.6 0 top
R32  100KR  [R0402]  111.84 12.7 270 top
R101  43.2K  [RESC1005_IS0402Q]  17.85 53.23 0 bottom
R102  13K  [RESC1005_IS0402Q]  17.85 52.34 0 bottom
R105  1.5K  [RESC1005_IS0402Q]  142.99 79.52 0 bottom
R106  150  [RESC2012_IS0805Q]  150.18 61.21 0 top
R110  22K  [RESC1005_IS0402Q]  72.19 41.73 270 top
R111  4.99K  [RESC1005_IS0402Q]  71.95 61.77 0 bottom
R112  10K  [RESC1005_IS0402Q]  70.94 60.37 270 bottom
R113  4.99K  [RESC1005_IS0402Q]  42.75 69.67 180 top
R114  20K  [RESC1005_IS0402Q]  44.15 70.1 90 top
R116  150  [RESC2012_IS0805Q]  149.37 88.77 0 top
R117  22K  [RESC1005_IS0402Q]  70.87 41.81 270 top
R119  649K  [RESC2012_IS0805Q]  138.38 63.55 270 bottom
R120  649K  [RESC2012_IS0805Q]  138.38 82.73 270 bottom
R122  0  [RESC1005_IS0402Q]  113.2 59.28 180 top
R123  0  [RESC1005_IS0402Q]  113.2 58.39 180 top
R124  10.7K  [RESC1005_IS0402Q]  151.46 58.98 180 top
R125  1.78K  [RESC1005_IS0402Q]  151.46 58.09 180 top
R126  10R_5C  [R0402]  9.06 53.06 90 top
R127  100K_5C  [R0402]  6.65 53.06 270 top
R128  33K  [R0402]  4.49 49.75 180 top
R129  40K2_1C  [R0402]  4.49 50.9 180 top
R130  12K7_1C  [R0402]  4.49 48.48 0 top
R131  100K_5C  [R0402]  9.19 70.84 270 top
R133  40K2_1C  [R0402]  5.38 66.26 180 top
R134  7K68_1C  [R0402]  5.38 68.8 0 top
R135  100K_5C  [R0402]  7.92 70.84 90 top
R136  33K  [R0402]  5.38 67.53 180 top
R142  13.7K  [RESC1005_IS0402Q]  75.51 71.12 0 bottom
R143  13.7K  [RESC1005_IS0402Q]  77.29 71.12 180 bottom
R144  21.5K  [RESC1005_IS0402Q]  54.76 60.86 270 bottom
R148  158K  [RESC1005_IS0402Q]  74.88 71.55 90 top
R149  158K  [RESC1005_IS0402Q]  73.61 71.55 90 top
R150  158K  [RESC1005_IS0402Q]  75.76 71.55 90 top
R151  158K  [RESC1005_IS0402Q]  77.03 71.55 90 top
R152  158K  [RESC1005_IS0402Q]  74.88 73.79 90 top
R153  158K  [RESC1005_IS0402Q]  73.61 73.79 90 top
R154  158K  [RESC1005_IS0402Q]  77.03 73.79 90 top
R155  158K  [RESC1005_IS0402Q]  75.76 73.79 90 top
R170  40.2K  [RESC1005_IS0402Q]  56.59 60.76 180 bottom
R176  2.61K (DNI)  [RESC1005_IS0402Q]  44.49 26.77 0 top
R177  2.61K (DNI)  [RESC1005_IS0402Q]  46.52 26.77 180 top
R178  4.32K (DNI)  [RESC1005_IS0402Q]  44.49 25.75 180 top
R179  4.32K (DNI)  [RESC1005_IS0402Q]  46.52 25.75 0 top
R181  150R_5C_NC  [R0402]  62.27 39.21 0 top
R182  150R_5C_NC  [R0402]  60.11 39.21 180 top
R183  100 (DNI)  [RESC1005_IS0402Q]  59.99 41.5 0 top
R188  0  [RESC1005_IS0402Q]  41.04 77.44 0 top
R190  0  [RESC1005_IS0402Q]  41.04 76.55 0 top
R195  0  [RESC1005_IS0402Q]  28.45 82.04 270 top
R197  0  [RESC1005_IS0402Q]  27.3 82.04 270 top
R201  10  [RESC1005_IS0402Q]  77.19 40.51 90 top
R202  10  [RESC1005_IS0402Q]  76.17 40.51 90 top
R204  240  [RESC1005_IS0402Q]  77.29 66.98 225 top
R205  1K  [RESC1005_IS0402Q]  101.42 57.71 270 bottom
R206  1K  [RESC1005_IS0402Q]  100.53 57.71 90 bottom
R207  33R_5C  [R0402]  82.01 56.84 180 top
R208  33R_5C  [R0402]  79.85 56.49 180 top
R211  0  [RESC1005_IS0402Q]  8.76 14.91 180 top
R212  0 (DNI)  [RESC1005_IS0402Q]  8.79 15.92 0 top
R215  240  [RESC1005_IS0402Q]  93.16 56.84 0 top
R216  0  [RESC1005_IS0402Q]  74.24 41.32 90 top
R217  4.7K  [RESC1005_IS0402Q]  11.05 15.92 180 top
R218  1K  [RESC1005_IS0402Q]  40.59 43.1 0 bottom
R219  0_NC  [RESC1005_IS0402Q]  70.84 41.78 90 bottom
R220  3K  [RESC1005_IS0402Q]  74.24 41.33 90 bottom
R221  56.2  [RESC1005_IS0402Q]  93.16 54.53 0 top
R222  56.2  [RESC1005_IS0402Q]  93.16 55.78 0 top
R223  3K  [RESC1005_IS0402Q]  78.63 28.17 270 top
R224  1K (DNI)  [RESC1005_IS0402Q]  77.75 28.17 270 top
R225  10K  [RESC1005_IS0402Q]  11.05 14.91 180 top
R228  10K  [RESC1005_IS0402Q]  69.16 48.44 90 bottom
R235  150  [RESC1005_IS0402Q]  119.38 7.49 0 bottom
R236  150  [RESC1005_IS0402Q]  110.11 7.37 0 bottom
R237  150  [RESC1005_IS0402Q]  100.33 6.99 0 bottom
R239  150  [RESC1005_IS0402Q]  43.84 5.03 180 bottom
R240  150  [RESC1005_IS0402Q]  97.66 6.53 180 bottom
R241  150  [RESC1005_IS0402Q]  91.66 6.55 180 bottom
R242  150  [RESC1005_IS0402Q]  79.69 7.06 0 bottom
R245  150  [RESC1005_IS0402Q]  72.85 7.04 0 bottom
R246  150  [RESC1005_IS0402Q]  65.68 7.04 180 bottom
R248  150  [RESC1005_IS0402Q]  58.59 6.99 180 bottom
R249  150  [RESC1005_IS0402Q]  52.17 4.65 180 top
R250  150  [RESC1005_IS0402Q]  22.01 33.12 0 bottom
R251  10K  [RESC1005_IS0402Q]  8.55 23.85 90 top
R252  10K  [RESC1005_IS0402Q]  8.93 32.48 180 top
R253  4.7K (DNI)  [RESC1005_IS0402Q]  66.45 39.01 180 bottom
R254  4.7K (DNI)  [RESC1005_IS0402Q]  40.59 47.55 180 bottom
R255  4.7K (DNI)  [RESC1005_IS0402Q]  40.59 48.44 180 bottom
R256  4.7K (DNI)  [RESC1005_IS0402Q]  24.08 40.56 180 bottom
R257  4.7K (DNI)  [RESC1005_IS0402Q]  42.87 44.25 0 bottom
R258  4.7K  [RESC1005_IS0402Q]  40.59 49.33 180 bottom
R259  4.7K  [RESC1005_IS0402Q]  28.14 49.83 0 bottom
R260  4.7K  [RESC1005_IS0402Q]  28.14 48.94 0 bottom
R261  4.7K (DNI)  [RESC1005_IS0402Q]  28.14 48.06 0 bottom
R262  4.7K (DNI)  [RESC1005_IS0402Q]  54.81 56.44 180 bottom
R263  4.7K  [RESC1005_IS0402Q]  54.81 55.55 180 bottom
R264  4.7K (DNI)  [RESC1005_IS0402Q]  46.3 55.29 90 bottom
R265  33R_5C  [R0402]  90.09 50.16 180 top
R266  0  [RESC1005_IS0402Q]  91.61 20.29 270 bottom
R267  33R_5C  [R0402]  87.19 49.58 180 top
R268  33R_5C  [R0402]  89.83 42.77 180 top
R269  33R_5C  [R0402]  91.99 48.84 180 top
R301  1K  [RESC1005_IS0402Q]  27.6 11.4 0 top
R302  10K  [RESC1005_IS0402Q]  28.96 17.22 270 top
R303  1K  [RESC1005_IS0402Q]  29.98 17.22 270 top
R305  4.7K  [RESC1005_IS0402Q]  55.67 8.86 90 bottom
R306  1K  [RESC1005_IS0402Q]  56.81 8.86 90 bottom
R309  402  [RESC1005_IS0402Q]  47.19 9.07 270 bottom
R319  10K  [RESC1005_IS0402Q]  48.05 26.26 270 top
R323  33  [RESC1005_IS0402Q]  55.41 35.53 270 top
R324  0 (DNI)  [RESC1608_IS0603Q]  35.73 13.56 90 top
R325  1K (DNI)  [RESC1005_IS0402Q]  46.3 9.07 90 bottom
R326  10K  [RESC1005_IS0402Q]  57.95 8.86 90 bottom
R327  0  [RESC1005_IS0402Q]  58.97 8.86 90 bottom
R328  2.61K (DNI)  [RESC1005_IS0402Q]  50.08 16.1 0 bottom
R329  2.61K (DNI)  [RESC1005_IS0402Q]  52.11 16.1 180 bottom
R330  100 (DNI)  [RESC1005_IS0402Q]  51.1 15.08 0 bottom
R331  4.32K (DNI)  [RESC1005_IS0402Q]  50.08 17.12 180 bottom
R332  4.32K (DNI)  [RESC1005_IS0402Q]  52.11 17.12 0 bottom
R402  75 (DNI)  [RESC1005_IS0402Q]  51.22 96.74 270 bottom
R404  75 (DNI)  [RESC1005_IS0402Q]  63.92 96.74 270 bottom
R405  75 (DNI)  [RESC1005_IS0402Q]  77.26 96.49 270 bottom
R407  75 (DNI)  [RESC1005_IS0402Q]  89.96 96.36 270 bottom
R409  6.04K  [RESC1005_IS0402Q]  65.22 62.91 90 bottom
R502  10K  [RESC1005_IS0402Q]  109.06 22.3 0 top
R503  0  [RESC1005_IS0402Q]  108.96 23.16 0 top
R704  6.49K  [RESC1005_IS0402Q]  116.81 73.47 0 top
R709  54.9K  [RESC1005_IS0402Q]  115.92 75.13 90 top
R710  44.2K  [RESC1005_IS0402Q]  116.81 76.27 270 top
R712  84.5K  [RESC1005_IS0402Q]  114.9 76.9 90 top
R716  84.5K  [RESC1005_IS0402Q]  127.73 76.9 90 top
R719  44.2K  [RESC1005_IS0402Q]  125.95 76.4 270 top
R720  54.9K  [RESC1005_IS0402Q]  126.84 75.13 90 top
R723  10M  [RESC3216_IS1206N]  112.49 98.11 270 bottom
R725  6.49K  [RESC1005_IS0402Q]  125.95 73.22 180 top
R732  10M  [RESC3216_IS1206N]  112.49 93.54 270 bottom
R734  10M  [RESC3216_IS1206N]  125.32 98.11 270 bottom
R736  10M  [RESC3216_IS1206N]  125.32 93.54 270 bottom
R737  49.9K  [RESC1005_IS0402Q]  125.19 71.06 270 top
R741  75  [RESC2012_IS0805Q]  119.45 82.02 180 bottom
R743  75  [RESC2012_IS0805Q]  122.88 82.02 0 bottom
R750  10K  [RESC1005_IS0402Q]  118.82 71.04 90 top
R752  10K  [RESC1005_IS0402Q]  119.71 71.04 90 top
R753  10K  [RESC1005_IS0402Q]  122.52 71.06 90 top
R754  10K  [RESC1005_IS0402Q]  117.8 71.04 90 top
R756  47K  [RESC1005_IS0402Q]  123.41 71.06 90 top
R760  1K  [RESC1608_IS0603Q]  121.13 81.73 90 top
R802  1K  [RESC1005_IS0402Q]  32.55 32.74 0 top
R803  1K  [RESC1005_IS0402Q]  30.01 32.74 0 top
R804  10K  [RESC1005_IS0402Q]  32.05 89.63 270 bottom
R806  4.7K  [RESC1005_IS0402Q]  104.72 32.31 270 top
R807  4.32K  [RESC1005_IS0402Q]  57.22 65.33 90 bottom
R810  0 (DNI)  [RESS2_VISH_MMA0204Q]  39.92 95.73 270 bottom
R811  0 (DNI)  [RESS2_VISH_MMA0204Q]  31.28 95.86 270 bottom
R904  0  [RESC1005_IS0402Q]  60.02 60.1 0 bottom
R905  0  [RESC1005_IS0402Q]  58.75 60.5 270 bottom
R994  100K_5C  [R0402]  7.92 53.06 90 top
R995  4.7K  [RESC1005_IS0402Q]  98.98 32.89 270 top
R996  0  [RESC1005_IS0402Q]  97.25 32.89 270 top
R997  0 (DNI)  [RESC1005_IS0402Q]  98.11 32.89 90 top
RN201  10K  [RESAS8_PAN_EXB18VQ]  89.58 18.26 270 bottom
RN202  33  [RESAS8_PAN_EXB18VQ]  88.82 53.49 0 top
RN203  33  [RESAS8_PAN_EXB18VQ]  87.49 51.61 0 top
RN204  33  [RESAS8_PAN_EXB18VQ]  88.56 47.24 0 top
RN205  33  [RESAS8_PAN_EXB18VQ]  87.9 44.55 0 top
RN206  33  [RESAS8_PAN_EXB18VQ]  89.76 40.89 0 top
RN208  33  [RESAS8_PAN_EXB18VQ]  78.1 65.51 45 top
RN209  33  [RESAS8_PAN_EXB18VQ]  78.18 62.53 45 top
RN210  33  [RESAS8_PAN_EXB18VQ]  77.8 60.37 0 top
RN211  33  [RESAS8_PAN_EXB18VQ]  79.32 58.98 0 top
RN212  33  [RESAS8_PAN_EXB18VQ]  77.8 57.45 0 top
SW101  NI  [DPDT8]  22 105.25 90 top
SW201  PB-SPST-MOM-R/A  [SWPBT4_ITT_PTS645VX31XXX]  2.54 10.41 90 top
SW202  PB-SPST-MOM-R/A  [SWPBT4_ITT_PTS645VX31XXX]  2.54 20.57 90 top
SW204  PB-SPST-MOM-R/A  [SWPBT4_ITT_PTS645VX31XXX]  2.54 30.73 90 top
T401  H2001DG  [DIP254_X20]  46.12 91.79 90 top
T402  H2001DG  [DIP254_X20]  72.2 91.69 90 top
TH701  90mA 230V  [FUSS4_BOU_CMF-SDPXX-2Q]  112.67 94.3 90 top
TH702  90mA 230V  [FUSS4_BOU_CMF-SDPXX-2Q]  125.17 94.28 90 top
TH703  3A 230V (DNI)  [FUST2_BOU_CMF-RL-D980X500]  109.19 96.33 90 top
TH704  3A 230V (DNI)  [FUST2_BOU_CMF-RL-D980X500]  116.15 92.27 90 top
TH705  3A 230V (DNI)  [FUST2_BOU_CMF-RL-D980X500]  121.87 96.19 90 top
TH706  3A 230V (DNI)  [FUST2_BOU_CMF-RL-D980X500]  128.75 92.27 90 top
TP1  TP-SMT-020-RND  [TP_SMD_020RD]  92.96 60.22 0 top
TP2  TP-SMT-020-RND  [TP_SMD_020RD]  93.09 44.4 0 top
TP3  TP-SMT-020-RND  [TP_SMD_020RD]  93.09 43.56 0 top
TP4  TP-SMT-020-RND  [TP_SMD_020RD]  101.59 42.44 0 top
U1  BCM43217TKMLG  [QFN40P800X800]  114.93 21 90 top
U2  RTC6603 (DNI)  [SC70-6_SC88-6_1_2_3_4_5_6]  125.95 23.44 0 top
U3  RTC6603 (DNI)  [SC70-6_SC88-6_1_2_3_4_5_6]  125.95 18.74 0 top
U4  PAM2305CGFADJ  [SON65P200X200_6_DFN2X2N]  111.74 9.88 0 top
U5  RT9166-12GVL  [SOT23_G_O_I]  122.3 33.37 270 top
U6  MP2161GJ  [TSOT23_8]  27.99 68.55 0 top
U101  BCM68380FKFSBG  [BGA80P25X25_407_2100X2100N]  65.6 54.91 180 top
U102  MP1497DJ  [TSOT_23_8]  7.66 48.99 0 top
U103  MP1496  [TSOT_23_8]  8.55 66.65 0 top
U104  74ACT08  [SOIC127P600_14_D865N]  146.82 74.47 270 bottom
U201  1Gb 800MHz 64Mx16 1.5V  [BGA80P9X16_96_900X1550N]  100.7 53.37 180 top
U205  K9F1G08U0D-SCB0000  [TSSOP50P2000_48_D1200N]  33.47 46.15 180 top
U301  OPGP-34-A4BSV  [MODT20_DELTA_OPGP-34-A4B3ZNT]  69.69 17.48 270 top
U701  LE9540CUQC  [QFN50P600X600_40_HS440N]  121.38 76.14 0 top
U704  TISP6NTP2CDR-S  [SOIC127P600_8_D490N]  121.1 87.8 90 bottom
U801  MIC2025-1YMM  [TSOP65P490_8_D300N]  36.75 90.39 0 bottom
V1  TP-0.65mm-RND-0.35mm-DRL  [TP_THP_065D035_MM]  107.97 27.25 270 bottom
V2  TP-0.65mm-RND-0.35mm-DRL  [TP_THP_065D035_MM]  107.97 25.19 270 bottom
V3  TP-0.65mm-RND-0.35mm-DRL  [TP_THP_065D035_MM]  103.55 15.85 0 top
V4  TP-0.65mm-RND-0.35mm-DRL  [TP_THP_065D035_MM]  103.42 11.15 0 top
V5  TP-0.65mm-RND-0.35mm-DRL  [TP_THP_065D035_MM]  103.42 13.56 0 top
V33  TEST HOLE  [TH50SQ32D]  13.76 52.8 270 top
V34  TEST HOLE  [TH50SQ32D]  20.45 70.26 0 top
V50  TEST HOLE  [TH50SQ32D]  13.76 70.96 270 top
V106  TP-0.65mm-RND-0.35mm-DRL  [TP_THP_065D035_MM]  110.58 48.31 0 top
V107  TP-0.65mm-RND-0.35mm-DRL  [TP_THP_065D035_MM]  41.63 65.43 0 top
V108  TP-0.65mm-RND-0.35mm-DRL  [TP_THP_065D035_MM]  38.65 82.01 0 top
V109  TP-0.65mm-RND-0.35mm-DRL  [TP_THP_065D035_MM]  117.73 8.76 0 top
V110  TP-0.65mm-RND-0.35mm-DRL  [TP_THP_065D035_MM]  67.89 40.72 0 top
V111  TP-0.65mm-RND-0.35mm-DRL  [TP_THP_065D035_MM]  67.89 39.01 0 top
V112  TP-0.65mm-RND-0.35mm-DRL  [TP_THP_065D035_MM]  68.38 35.56 0 top
V113  TP-0.65mm-RND-0.35mm-DRL  [TP_THP_065D035_MM]  68.3 37.29 0 top
V114  TP-0.65mm-RND-0.35mm-DRL  [TP_THP_065D035_MM]  46.84 45.03 0 top
V701  TP-1.15mmPAD-0.6mmDRL  [TP_THP_115D060_MM]  115.36 100.94 0 top
V702  TP-1.15mmPAD-0.6mmDRL  [TP_THP_115D060_MM]  117.9 100.94 0 top
V703  TP-1.15mmPAD-0.6mmDRL  [TP_THP_115D060_MM]  127.8 100.94 0 top
V704  TP-1.15mmPAD-0.6mmDRL  [TP_THP_115D060_MM]  130.6 100.81 0 top
Y1  20.000MHz  [XTALS4_2M5X2M]  116.25 31.09 90 top
Y201  HC49S9B-25.000MHz  [CRY2D_TXC_HC9B]  82.27 35.66 180 top

## Library data of the parts
ANT1 ANT2 = N2430GNS_ANT
C1 C2 C4-C43 C45-C55 C59-C66 C72 C74 C75 C78 C79 C102 C103 C109-C123 C125-C127 C129-C131 C150 C165-C167 C177 C179 C180 C184 C189 C201-C218 C223 C224 C229 C230 C232-C235 C251 C252 C256 C301-C303 C309 C405-C408 C504-C507 C602 C603 C701 C704-C706 C708 C710-C714 C720 C721 C726-C728 C732 C733 C741 C743 C744 C746-C748 C800 C801 C807 C901 C902 C908 C909 C923-C925 R11 R13 = CAP: User Part Number: Part No
C44 C56 C80 C104-C106 C108 C124 C132-C137 C139-C146 C158 C409 C414 C415 = C_SMD_NO_POLAR
C101 C171-C173 C806 = CAP-PN: User Part Number: Part No
C176 C178 = CAP: User Part Number: Part No; room: SHEET 2
C219 C220 C417 C422 C812 C813 = CAP-NP: User Part Number: Part No
C257 C258 C903-C907 C910-C913 C920 C922 C931-C938 C941 C943-C963 = CAP: User Part Number: Part No; room: SHEET 5
C304 C306 C310 C312 = CAP: User Part Number: Part No; room: SHEET 16
C305 C307 C311 = CAP: User Part Number: Part No; room: SHEET 17
C313-C316 = CAP: User Part Number: Part No; signal model: CAP_CAPC1005_IS0402Q_DISCRETE_0_0.1uF; room: SHEET 16
C802 C803 = CAP: User Part Number: Part No; signal model: CAP_CAPC1005_IS0402Q_DISCRET_10_100pF
C804 C805 = CAP: User Part Number: Part No; signal model: CAP_CAPC1005_IS0402Q_DISCRETE_0_0.1uF
D101-D104 = DIO: User Part Number: Part No
D121 = DIO-ZENER: User Part Number: Part No
D201-D203 D205-D213 = LED_COVER_SINGLE
D800 = RCLAMP0582N_TCT
FB1-FB3 FB102 FB103 FB702 FB901 = FB: User Part Number: Part No
FB902-FB915 = FB: User Part Number: Part No; room: SHEET 5
FL1 FL2 = FILT-I4O2G13: User Part Number: Part No
GND V33 V34 V50 = TP_HOLE
J2 J3 = RF-3GND: User Part Number: Part No
J101 = DC_POWER_JACK_2.5MM
J401 = SKT-32-4PORT8-J: User Part Number: Part No
J701 J702 = RJ11_1X1_5523_1_6P_6C
J801 = TJC3-4
J802 = CON-USB-4-4SH-ALT-J
L1-L3 L5-L7 = IND-DOT-1: User Part Number: Part No
L4 L105 L110 L113 L114 = IND-SHIELDED-NO-DOT: User Part Number: Part No
L8 L106 = IND-SHIELDED: User Part Number: Part No
L102 L103 = power
L111 L112 R1-R5 R9 R10 R12 R14-R17 R20 R23 R26 R101 R102 R105 R106 R110-R114 R116 R117 R119 R120 R122-R125 R142-R144 R148-R155 R170 R176-R179 R183 R195 R197 R201 R202 R204-R206 R211 R212 R215-R225 R228 R235-R237 R239-R242 R245 R246 R248-R264 R266 R301-R303 R305 R306 R309 R319 R323-R332 R402 R404 R405 R407 R409 R502 R503 R704 R709 R710 R712 R716 R719 R720 R723 R725 R732 R734 R736 R737 R741 R743 R750 R752-R754 R756 R760 R802-R804 R806 R807 R810 R811 R995-R997 = RES: User Part Number: Part No
L301 L302 L901 = IND: User Part Number: Part No
Q103 Q104 = FET-MOS-N: User Part Number: Part No
Q105 Q106 = MOSFET-NP-DUAL-DIL6-N: User Part Number: Part No
Q107 Q108 = MOSFET-NP-DUAL-DIL6-2-2D: User Part Number: Part No
Q301 = FET-MOS-P: User Part Number: Part No
Q303 = NPN: User Part Number: Part No
R7 R126 R127 R129-R131 R133-R135 R181 R182 R207 R208 R265 R267-R269 R994 = SMD_Resistance
R21 R32 = R0402_100KR_1C_1_16W
R22 = R0402_499KR_1C_1_16W
R24 R25 R27 = R0402_200KR_1C_1_16W
R28 = R0805_0R_5C_1_8W
R29 = R0402_NCR_1C_1_16W
R128 R136 = R_0_0603
R188 R190 = RES: User Part Number: Part No; room: SHEET 2
R904 R905 = RES: User Part Number: Part No; room: SHEET 5
RN201-RN206 RN208-RN212 = RN8D3-A: User Part Number: Part No
SW101 = PS-22F34_DPDT
SW201 SW202 SW204 = SW-PB-SPST-GG: User Part Number: Part No
T401 T402 = Dual Port_10/100M_H2001DG_DIP
TH701 TH702 = FUSE-RESETTABLE-12-34: User Part Number: Part No
TH703-TH706 = FUSE-RESETTABLE-12: User Part Number: Part No
TP1-TP4 = TP-SQR: User Part Number: Part No
U1 = BCM43217TKMLG-W1000-20892: User Part Number: Part No
U2 U3 = RTC6603-SC70-6-ALT: User Part Number: Part No
U4 = PAM2305-DFN6H: User Part Number: Part No
U5 = REG-IGO: User Part Number: Part No
U6 = MP2161GJ_TSOT23_8
U101 = BCM68380FKFSBG-W1000-26328-RFD: User Part Number: Part No
U102 = MP1497DJ_2
U103 = MP1496_0
U104 = AND2_0: User Part Number: Part No
U201 = SDRAM-DDR3-64M16-BGA96: User Part Number: Part No
U205 = K9F1G08U0A-TSOP48-ALT: User Part Number: Part No
U301 = OPGP-34-A4B3ZNT-J: User Part Number: Part No
U701 = LE9540D-QFN40H: User Part Number: Part No
U704 = TISP6NTP2C: User Part Number: Part No
U801 = MIC2025-NS: User Part Number: Part No
V1-V5 V106-V114 = TP-VIA: User Part Number: Part No
V701-V704 = TP: User Part Number: Part No
Y1 = XTAL-1G3G: User Part Number: Part No
Y201 = crystal-2p

## Footprints (pads in the part's own frame, mm; a bottom-side part is the same pattern mirrored in y, then rotated)
AMPHL_A-1JB
  rect 1x2.15 smd: G1(-1.473,0) G3(1.473,0)
  rect 1x1 smd: G2(0,1.524) S(0,-1.524)
AMPHL_RJE01-640-021
  round 4.35 hole 3.35: (-1.905,-8.89) (8.255,-8.89)
  rect 1.5x1.5 hole 0.9: 1(0,0)
  round 1.5 hole 0.9: 2(1.27,-2.54) 3(2.54,0) 4(3.81,-2.54) 5(6.35,-2.54) 6(5.08,0)
BGA80P9X16_96_900X1550N
  round 0.35 smd: A1(-3.2,6) A2(-2.4,6) A3(-1.6,6) A7(1.6,6) A8(2.4,6) A9(3.2,6) B1(-3.2,5.2) B2(-2.4,5.2) B3(-1.6,5.2) B7(1.6,5.2) B8(2.4,5.2) B9(3.2,5.2) C1(-3.2,4.4) C2(-2.4,4.4) C3(-1.6,4.4) C7(1.6,4.4) C8(2.4,4.4) C9(3.2,4.4) D1(-3.2,3.6) D2(-2.4,3.6) D3(-1.6,3.6) D7(1.6,3.6) D8(2.4,3.6) D9(3.2,3.6) E1(-3.2,2.8) E2(-2.4,2.8) E3(-1.6,2.8) E7(1.6,2.8) E8(2.4,2.8) E9(3.2,2.8) F1(-3.2,2) F2(-2.4,2) F3(-1.6,2) F7(1.6,2) F8(2.4,2) F9(3.2,2) G1(-3.2,1.2) G2(-2.4,1.2) G3(-1.6,1.2) G7(1.6,1.2) G8(2.4,1.2) G9(3.2,1.2) H1(-3.2,0.4) H2(-2.4,0.4) H3(-1.6,0.4) H7(1.6,0.4) H8(2.4,0.4) H9(3.2,0.4) J1(-3.2,-0.4) J2(-2.4,-0.4) J3(-1.6,-0.4) J7(1.6,-0.4) J8(2.4,-0.4) J9(3.2,-0.4) K1(-3.2,-1.2) K2(-2.4,-1.2) K3(-1.6,-1.2) K7(1.6,-1.2) K8(2.4,-1.2) K9(3.2,-1.2) L1(-3.2,-2) L2(-2.4,-2) L3(-1.6,-2) L7(1.6,-2) L8(2.4,-2) L9(3.2,-2) M1(-3.2,-2.8) M2(-2.4,-2.8) M3(-1.6,-2.8) M7(1.6,-2.8) M8(2.4,-2.8) M9(3.2,-2.8) N1(-3.2,-3.6) N2(-2.4,-3.6) N3(-1.6,-3.6) N7(1.6,-3.6) N8(2.4,-3.6) N9(3.2,-3.6) P1(-3.2,-4.4) P2(-2.4,-4.4) P3(-1.6,-4.4) P7(1.6,-4.4) P8(2.4,-4.4) P9(3.2,-4.4) R1(-3.2,-5.2) R2(-2.4,-5.2) R3(-1.6,-5.2) R7(1.6,-5.2) R8(2.4,-5.2) R9(3.2,-5.2) T1(-3.2,-6) T2(-2.4,-6) T3(-1.6,-6) T7(1.6,-6) T8(2.4,-6) T9(3.2,-6)
BGA80P25X25_407_2100X2100N
  round 0.35 smd: A1(-9.6,9.6) A2(-8.8,9.6) A3(-8,9.6) A4(-7.2,9.6) A6(-5.6,9.6) A7(-4.8,9.6) A9(-3.2,9.6) A10(-2.4,9.6) A12(-0.8,9.6) A13(0,9.6) A15(1.6,9.6) A16(2.4,9.6) A18(4,9.6) A19(4.8,9.6) A21(6.4,9.6) A22(7.2,9.6) A23(8,9.6) A24(8.8,9.6) A25(9.6,9.6) AA2(-8.8,-6.4) AA3(-8,-6.4) AA4(-7.2,-6.4) AA5(-6.4,-6.4) AA12(-0.8,-6.4) AA13(0,-6.4) AA14(0.8,-6.4) AA15(1.6,-6.4) AA16(2.4,-6.4) AA17(3.2,-6.4) AA18(4,-6.4) AA19(4.8,-6.4) AA20(5.6,-6.4) AA22(7.2,-6.4) AA23(8,-6.4) AA24(8.8,-6.4) AA25(9.6,-6.4) AB1(-9.6,-7.2) AB2(-8.8,-7.2) AB3(-8,-7.2) AB4(-7.2,-7.2) AB5(-6.4,-7.2) AB6(-5.6,-7.2) AB7(-4.8,-7.2) AB8(-4,-7.2) AB9(-3.2,-7.2) AB10(-2.4,-7.2) AB11(-1.6,-7.2) AB12(-0.8,-7.2) AB13(0,-7.2) AB14(0.8,-7.2) AB15(1.6,-7.2) AB16(2.4,-7.2) AB17(3.2,-7.2) AB18(4,-7.2) AB19(4.8,-7.2) AB20(5.6,-7.2) AB21(6.4,-7.2) AB22(7.2,-7.2) AB23(8,-7.2) AB24(8.8,-7.2) AB25(9.6,-7.2) AC1(-9.6,-8) AC2(-8.8,-8) AC3(-8,-8) AC4(-7.2,-8) AC5(-6.4,-8) AC6(-5.6,-8) AC7(-4.8,-8) AC8(-4,-8) AC9(-3.2,-8) AC10(-2.4,-8) AC11(-1.6,-8) AC12(-0.8,-8) AC13(0,-8) AC14(0.8,-8) AC15(1.6,-8) AC16(2.4,-8) AC17(3.2,-8) AC18(4,-8) AC19(4.8,-8) AC20(5.6,-8) AC21(6.4,-8) AC22(7.2,-8) AC23(8,-8) AC24(8.8,-8) AC25(9.6,-8) AD1(-9.6,-8.8) AD2(-8.8,-8.8) AD3(-8,-8.8) AD4(-7.2,-8.8) AD5(-6.4,-8.8) AD6(-5.6,-8.8) AD7(-4.8,-8.8) AD8(-4,-8.8) AD9(-3.2,-8.8) AD10(-2.4,-8.8) AD11(-1.6,-8.8) AD12(-0.8,-8.8) AD13(0,-8.8) AD14(0.8,-8.8) AD15(1.6,-8.8) AD16(2.4,-8.8) AD17(3.2,-8.8) AD18(4,-8.8) AD19(4.8,-8.8) AD20(5.6,-8.8) AD21(6.4,-8.8) AD22(7.2,-8.8) AD23(8,-8.8) AD24(8.8,-8.8) AD25(9.6,-8.8) AE1(-9.6,-9.6) AE2(-8.8,-9.6) AE3(-8,-9.6) AE4(-7.2,-9.6) AE5(-6.4,-9.6) AE7(-4.8,-9.6) AE8(-4,-9.6) AE10(-2.4,-9.6) AE11(-1.6,-9.6) AE13(0,-9.6) AE14(0.8,-9.6) AE16(2.4,-9.6) AE17(3.2,-9.6) AE19(4.8,-9.6) AE20(5.6,-9.6) AE22(7.2,-9.6) AE23(8,-9.6) AE24(8.8,-9.6) AE25(9.6,-9.6) B1(-9.6,8.8) B2(-8.8,8.8) B3(-8,8.8) B4(-7.2,8.8) B5(-6.4,8.8) B6(-5.6,8.8) B7(-4.8,8.8) B8(-4,8.8) B9(-3.2,8.8) B10(-2.4,8.8) B11(-1.6,8.8) B12(-0.8,8.8) B13(0,8.8) B14(0.8,8.8) B15(1.6,8.8) B16(2.4,8.8) B17(3.2,8.8) B18(4,8.8) B19(4.8,8.8) B20(5.6,8.8) B21(6.4,8.8) B22(7.2,8.8) B23(8,8.8) B24(8.8,8.8) B25(9.6,8.8) C1(-9.6,8) C2(-8.8,8) C3(-8,8) C4(-7.2,8) C5(-6.4,8) C6(-5.6,8) C7(-4.8,8) C8(-4,8) C9(-3.2,8) C10(-2.4,8) C11(-1.6,8) C12(-0.8,8) C13(0,8) C14(0.8,8) C15(1.6,8) C16(2.4,8) C17(3.2,8) C18(4,8) C19(4.8,8) C20(5.6,8) C21(6.4,8) C22(7.2,8) C23(8,8) C24(8.8,8) C25(9.6,8) D1(-9.6,7.2) D2(-8.8,7.2) D3(-8,7.2) D4(-7.2,7.2) D5(-6.4,7.2) D6(-5.6,7.2) D7(-4.8,7.2) D8(-4,7.2) D9(-3.2,7.2) D10(-2.4,7.2) D14(0.8,7.2) D15(1.6,7.2) D16(2.4,7.2) D17(3.2,7.2) D18(4,7.2) D19(4.8,7.2) D20(5.6,7.2) D21(6.4,7.2) D22(7.2,7.2) D23(8,7.2) D24(8.8,7.2) D25(9.6,7.2) E1(-9.6,6.4) E2(-8.8,6.4) E3(-8,6.4) E19(4.8,6.4) E22(7.2,6.4) E23(8,6.4) E24(8.8,6.4) F2(-8.8,5.6) F3(-8,5.6) F4(-7.2,5.6) F22(7.2,5.6) F23(8,5.6) F24(8.8,5.6) F25(9.6,5.6) G1(-9.6,4.8) G2(-8.8,4.8) G3(-8,4.8) G4(-7.2,4.8) G22(7.2,4.8) G23(8,4.8) G24(8.8,4.8) G25(9.6,4.8) H1(-9.6,4) H2(-8.8,4) H3(-8,4) H4(-7.2,4) H22(7.2,4) H23(8,4) H24(8.8,4) J2(-8.8,3.2) J3(-8,3.2) J4(-7.2,3.2) J9(-3.2,3.2) J10(-2.4,3.2) J11(-1.6,3.2) J12(-0.8,3.2) J13(0,3.2) J14(0.8,3.2) J15(1.6,3.2) J16(2.4,3.2) J17(3.2,3.2) J22(7.2,3.2) J23(8,3.2) J24(8.8,3.2) J25(9.6,3.2) K1(-9.6,2.4) K2(-8.8,2.4) K3(-8,2.4) K4(-7.2,2.4) K9(-3.2,2.4) K10(-2.4,2.4) K11(-1.6,2.4) K12(-0.8,2.4) K13(0,2.4) K14(0.8,2.4) K15(1.6,2.4) K16(2.4,2.4) K17(3.2,2.4) K22(7.2,2.4) K23(8,2.4) K24(8.8,2.4) K25(9.6,2.4) L1(-9.6,1.6) L2(-8.8,1.6) L3(-8,1.6) L4(-7.2,1.6) L5(-6.4,1.6) L9(-3.2,1.6) L10(-2.4,1.6) L11(-1.6,1.6) L12(-0.8,1.6) L13(0,1.6) L14(0.8,1.6) L15(1.6,1.6) L16(2.4,1.6) L17(3.2,1.6) L22(7.2,1.6) L23(8,1.6) L24(8.8,1.6) M2(-8.8,0.8) M3(-8,0.8) M4(-7.2,0.8) M9(-3.2,0.8) M10(-2.4,0.8) M11(-1.6,0.8) M12(-0.8,0.8) M13(0,0.8) M14(0.8,0.8) M15(1.6,0.8) M16(2.4,0.8) M17(3.2,0.8) M22(7.2,0.8) M23(8,0.8) M24(8.8,0.8) M25(9.6,0.8) N1(-9.6,0) N2(-8.8,0) N3(-8,0) N4(-7.2,0) N5(-6.4,0) N9(-3.2,0) N10(-2.4,0) N11(-1.6,0) N12(-0.8,0) N13(0,0) N14(0.8,0) N15(1.6,0) N16(2.4,0) N17(3.2,0) N22(7.2,0) N23(8,0) N24(8.8,0) N25(9.6,0) P1(-9.6,-0.8) P2(-8.8,-0.8) P3(-8,-0.8) P4(-7.2,-0.8) P9(-3.2,-0.8) P10(-2.4,-0.8) P11(-1.6,-0.8) P12(-0.8,-0.8) P13(0,-0.8) P14(0.8,-0.8) P15(1.6,-0.8) P16(2.4,-0.8) P17(3.2,-0.8) P22(7.2,-0.8) P23(8,-0.8) P24(8.8,-0.8) R2(-8.8,-1.6) R3(-8,-1.6) R4(-7.2,-1.6) R9(-3.2,-1.6) R10(-2.4,-1.6) R11(-1.6,-1.6) R12(-0.8,-1.6) R13(0,-1.6) R14(0.8,-1.6) R15(1.6,-1.6) R16(2.4,-1.6) R17(3.2,-1.6) R22(7.2,-1.6) R23(8,-1.6) R24(8.8,-1.6) R25(9.6,-1.6) T1(-9.6,-2.4) T2(-8.8,-2.4) T3(-8,-2.4) T4(-7.2,-2.4) T9(-3.2,-2.4) T10(-2.4,-2.4) T11(-1.6,-2.4) T12(-0.8,-2.4) T13(0,-2.4) T14(0.8,-2.4) T15(1.6,-2.4) T16(2.4,-2.4) T17(3.2,-2.4) T22(7.2,-2.4) T23(8,-2.4) T24(8.8,-2.4) T25(9.6,-2.4) U1(-9.6,-3.2) U2(-8.8,-3.2) U3(-8,-3.2) U4(-7.2,-3.2) U9(-3.2,-3.2) U10(-2.4,-3.2) U11(-1.6,-3.2) U12(-0.8,-3.2) U13(0,-3.2) U14(0.8,-3.2) U15(1.6,-3.2) U16(2.4,-3.2) U17(3.2,-3.2) U22(7.2,-3.2) U23(8,-3.2) U24(8.8,-3.2) V2(-8.8,-4) V3(-8,-4) V4(-7.2,-4) V5(-6.4,-4) V15(1.6,-4) V22(7.2,-4) V23(8,-4) V24(8.8,-4) V25(9.6,-4) W1(-9.6,-4.8) W2(-8.8,-4.8) W3(-8,-4.8) W4(-7.2,-4.8) W5(-6.4,-4.8) W22(7.2,-4.8) W23(8,-4.8) W24(8.8,-4.8) W25(9.6,-4.8) Y1(-9.6,-5.6) Y2(-8.8,-5.6) Y3(-8,-5.6) Y4(-7.2,-5.6) Y18(4,-5.6) Y19(4.8,-5.6) Y21(6.4,-5.6) Y23(8,-5.6) Y24(8.8,-5.6)
C0402
  rect 0.61x0.508 smd: 1(-0.508,0) 2(0.508,0)
C0805
  rect 1.143x1.27 smd: 1(-0.889,0) 2(0.889,0)
C1206
  rect 1.397x1.651 smd: 1(-1.397,0) 2(1.397,0)
C1210
  rect 1.778x2.794 smd: 1(-1.854,0) 2(1.854,0)
CAPAETR2_200P500X1100
  round 1.4 hole 0.9: N(0,-2)
  rect 1.4x1.4 hole 0.9: P(0,0)
CAPAETR2_250P630X1120
  round 1.4 hole 0.9: N(0,-2.5)
  rect 1.4x1.4 hole 0.9: P(0,0)
CAPAETR2_500P1250X2000
  round 1.5 hole 1: N(0,-5)
  rect 1.5x1.5 hole 1: P(0,0)
CAPC1005_IS0402Q
  rect 0.55x0.5 smd: 1(-0.425,0) 2(0.425,0)
CAPC1608_IS0603Q
  rect 0.75x0.9 smd: 1(-0.675,0) 2(0.675,0)
CAPC2012_IS0805Q
  rect 1x1.4 smd: 1(-0.88,0) 2(0.88,0)
CAPC3216_IS1206N
  rect 1.3x1.8 smd: 1(-1.45,0) 2(1.45,0)
CAPC3225_IS1210N
  rect 1.3x2.7 smd: 1(-1.45,0) 2(1.45,0)
CRY2D_TXC_HC9B
  rect 1.524x1.524 hole 0.889: 1(0,0)
  round 1.524 hole 0.889: 2(4.877,0)
DIOM4326_SMA_DO214ACN
  rect 2.7x1.6 smd: A(1.95,0) C(-1.95,0)
DIOS2_ON_SOD123N
  rect 1.15x0.65 smd: A(1.725,0) C(-1.725,0)
DIP2_N2430GNS
  rect 2.1x1.3 hole 1.1x0.3: 1(10.3,0) 2(-10.3,0)
DIP254_X20
  rect 2x2 hole 1: 1(0,0)
  round 2.007 hole 0.991: 2(0,-2.54) 3(0,-5.08) 4(0,-7.62) 5(0,-10.16) 6(0,-12.7) 7(0,-15.24) 8(0,-17.78) 9(0,-20.32) 10(0,-22.86) 11(7.62,-22.86) 12(7.62,-20.32) 13(7.62,-17.78) 14(7.62,-15.24) 15(7.62,-12.7) 16(7.62,-10.16) 17(7.62,-7.62) 18(7.62,-5.08) 19(7.62,-2.54) 20(7.62,0)
DPDT8
  round 1.905 hole 1.397: 1(3.2,-1.5) 2(0,-1.5) 3(-3.2,-1.5) 4(3.2,1.5) 5(0,1.5) 6(-3.2,1.5) 7(5.8,3.3) 8(-5.8,-3.3)
DS_210
  oval 1.27x3.734 hole 0.762x3.226: 1(3,0.15)
  oval 1.118x3.683 hole 0.61x3.175: 2(-3,0.15)
  oval 3.048x1.27 hole 2.54x0.762: 3(0.2,-4.65)
FILS4_MUR_LFL152G45TC1Q
  rect 0.3x0.45 smd: 1(0,0.325) 3(0,-0.325)
  rect 0.45x0.3 smd: 2(0.575,0) 4(-0.575,0)
FUSS4_BOU_CMF-SDPXX-2Q
  rect 3.2x2 smd: 1(-3.4,3.8) 2(3.4,1.2) 3(-3.4,-1.2) 4(3.4,-3.8)
FUST2_BOU_CMF-RL-D980X500
  round 1.5 hole 1: 1(-2.54,0) 2(2.54,0)
HDR1X4
  rect 1.524x1.524 hole 0.889: 1(0,0)
  round 1.524 hole 0.889: 2(2.54,0) 3(5.08,0) 4(7.62,0)
INDC1005_IS0402Q
  rect 0.55x0.5 smd: 1(-0.425,0) 2(0.425,0)
INDC1608_IS0603Q
  rect 0.75x0.9 smd: 1(-0.675,0) 2(0.675,0)
INDC2012_IS0805Q
  rect 1x1.4 smd: 1(-0.88,0) 2(0.88,0)
INDS2_CC_0805CSQ
  rect 1.8x1 smd: 1(0,0.889) 2(0,-0.889)
INDS2_CYN_PS125201BQ
  rect 0.9x2.1 smd: 1(-0.85,0) 2(0.85,0)
INDS2_MUR_LQG15HQ
  rect 0.55x0.5 smd: 1(0,0.463) 2(0,-0.463)
INDS2_TAYUD_NR6045Q
  rect 5.7x1.6 smd: 1(0,2.35) 2(0,-2.35)
INDS2_TDK_FLF3215TQ_MOD
  rect 1.45x2.05 smd: 1(-1.27,0) 2(1.27,0)
INDS2_TDK_SLF6045Q
  rect 1.5x2.2 smd: 1(-2.75,0) 2(2.75,0)
LED_2_2_54
  rect 1.422x1.422 hole 0.914: 1(-1.27,0)
  round 1.422 hole 0.914: 2(1.27,0)
MODT20_DELTA_OPGP-34-A4B3ZNT
  rect 1.3x1.3 hole 0.8: 1(-5.08,-8.87)
  round 1.3 hole 0.8: 2(-5.08,-10.65) 3(-5.08,-12.43) 4(-5.08,-14.21) 5(-5.08,-15.99) 6(-5.08,-17.77) 7(-5.08,-19.55) 8(-5.08,-21.33) 9(-5.08,-23.11) 10(-5.08,-24.89) 11(5.08,-24.89) 12(5.08,-23.11) 13(5.08,-21.33) 14(5.08,-19.55) 15(5.08,-17.77) 16(5.08,-15.99) 17(5.08,-14.21) 18(5.08,-12.43) 19(5.08,-10.65) 20(5.08,-8.87)
  round 2.1 hole 1.35: SH1(-5.08,0) SH2(5.08,0)
MOL_67329-8020
  rect 1.52x1.52 hole 0.92: 1(0,0)
  round 1.52 hole 0.92: 2(2,0) 3(4,0) 4(6,0)
  round 2 hole 1.4: SH1(-0.5,2.9) SH2(-0.5,-2.9) SH3(6.5,-2.9) SH4(6.5,2.9)
NETSWAP_NSK-U-04-8-8-X-X
  custom 2.4x0.6 hole 3.2 unplated: (-1.27,-6.35) (52.07,-6.35)
  rect 1.4x1.4 hole 0.9: A1(0,0)
  round 1.4 hole 0.9: A2(1.27,2.54) A3(2.54,0) A4(3.81,2.54) A5(5.08,0) A6(6.35,2.54) A7(7.62,0) A8(8.89,2.54) B1(13.97,0) B2(15.24,2.54) B3(16.51,0) B4(17.78,2.54) B5(19.05,0) B6(20.32,2.54) B7(21.59,0) B8(22.86,2.54) C1(27.94,0) C2(29.21,2.54) C3(30.48,0) C4(31.75,2.54) C5(33.02,0) C6(34.29,2.54) C7(35.56,0) C8(36.83,2.54) D1(41.91,0) D2(43.18,2.54) D3(44.45,0) D4(45.72,2.54) D5(46.99,0) D6(48.26,2.54) D7(49.53,0) D8(50.8,2.54)
